# Altium PCB Pannel3.5x3.PcbDoc (part 1 of 4)
Units mil, origin at the board's own origin, x right, y up, seen from the top; angles counter-clockwise.
Board outline 3543.31 x 2771.65 mil, 4 copper layers (SIGNAL, GROUND, PWR, SIGNAL (Bottom)), stack 61.627 mil thick; 248 components, 189 nets, 921 pads, 651 vias.
Unrouted connection lines stored in the file: 1.
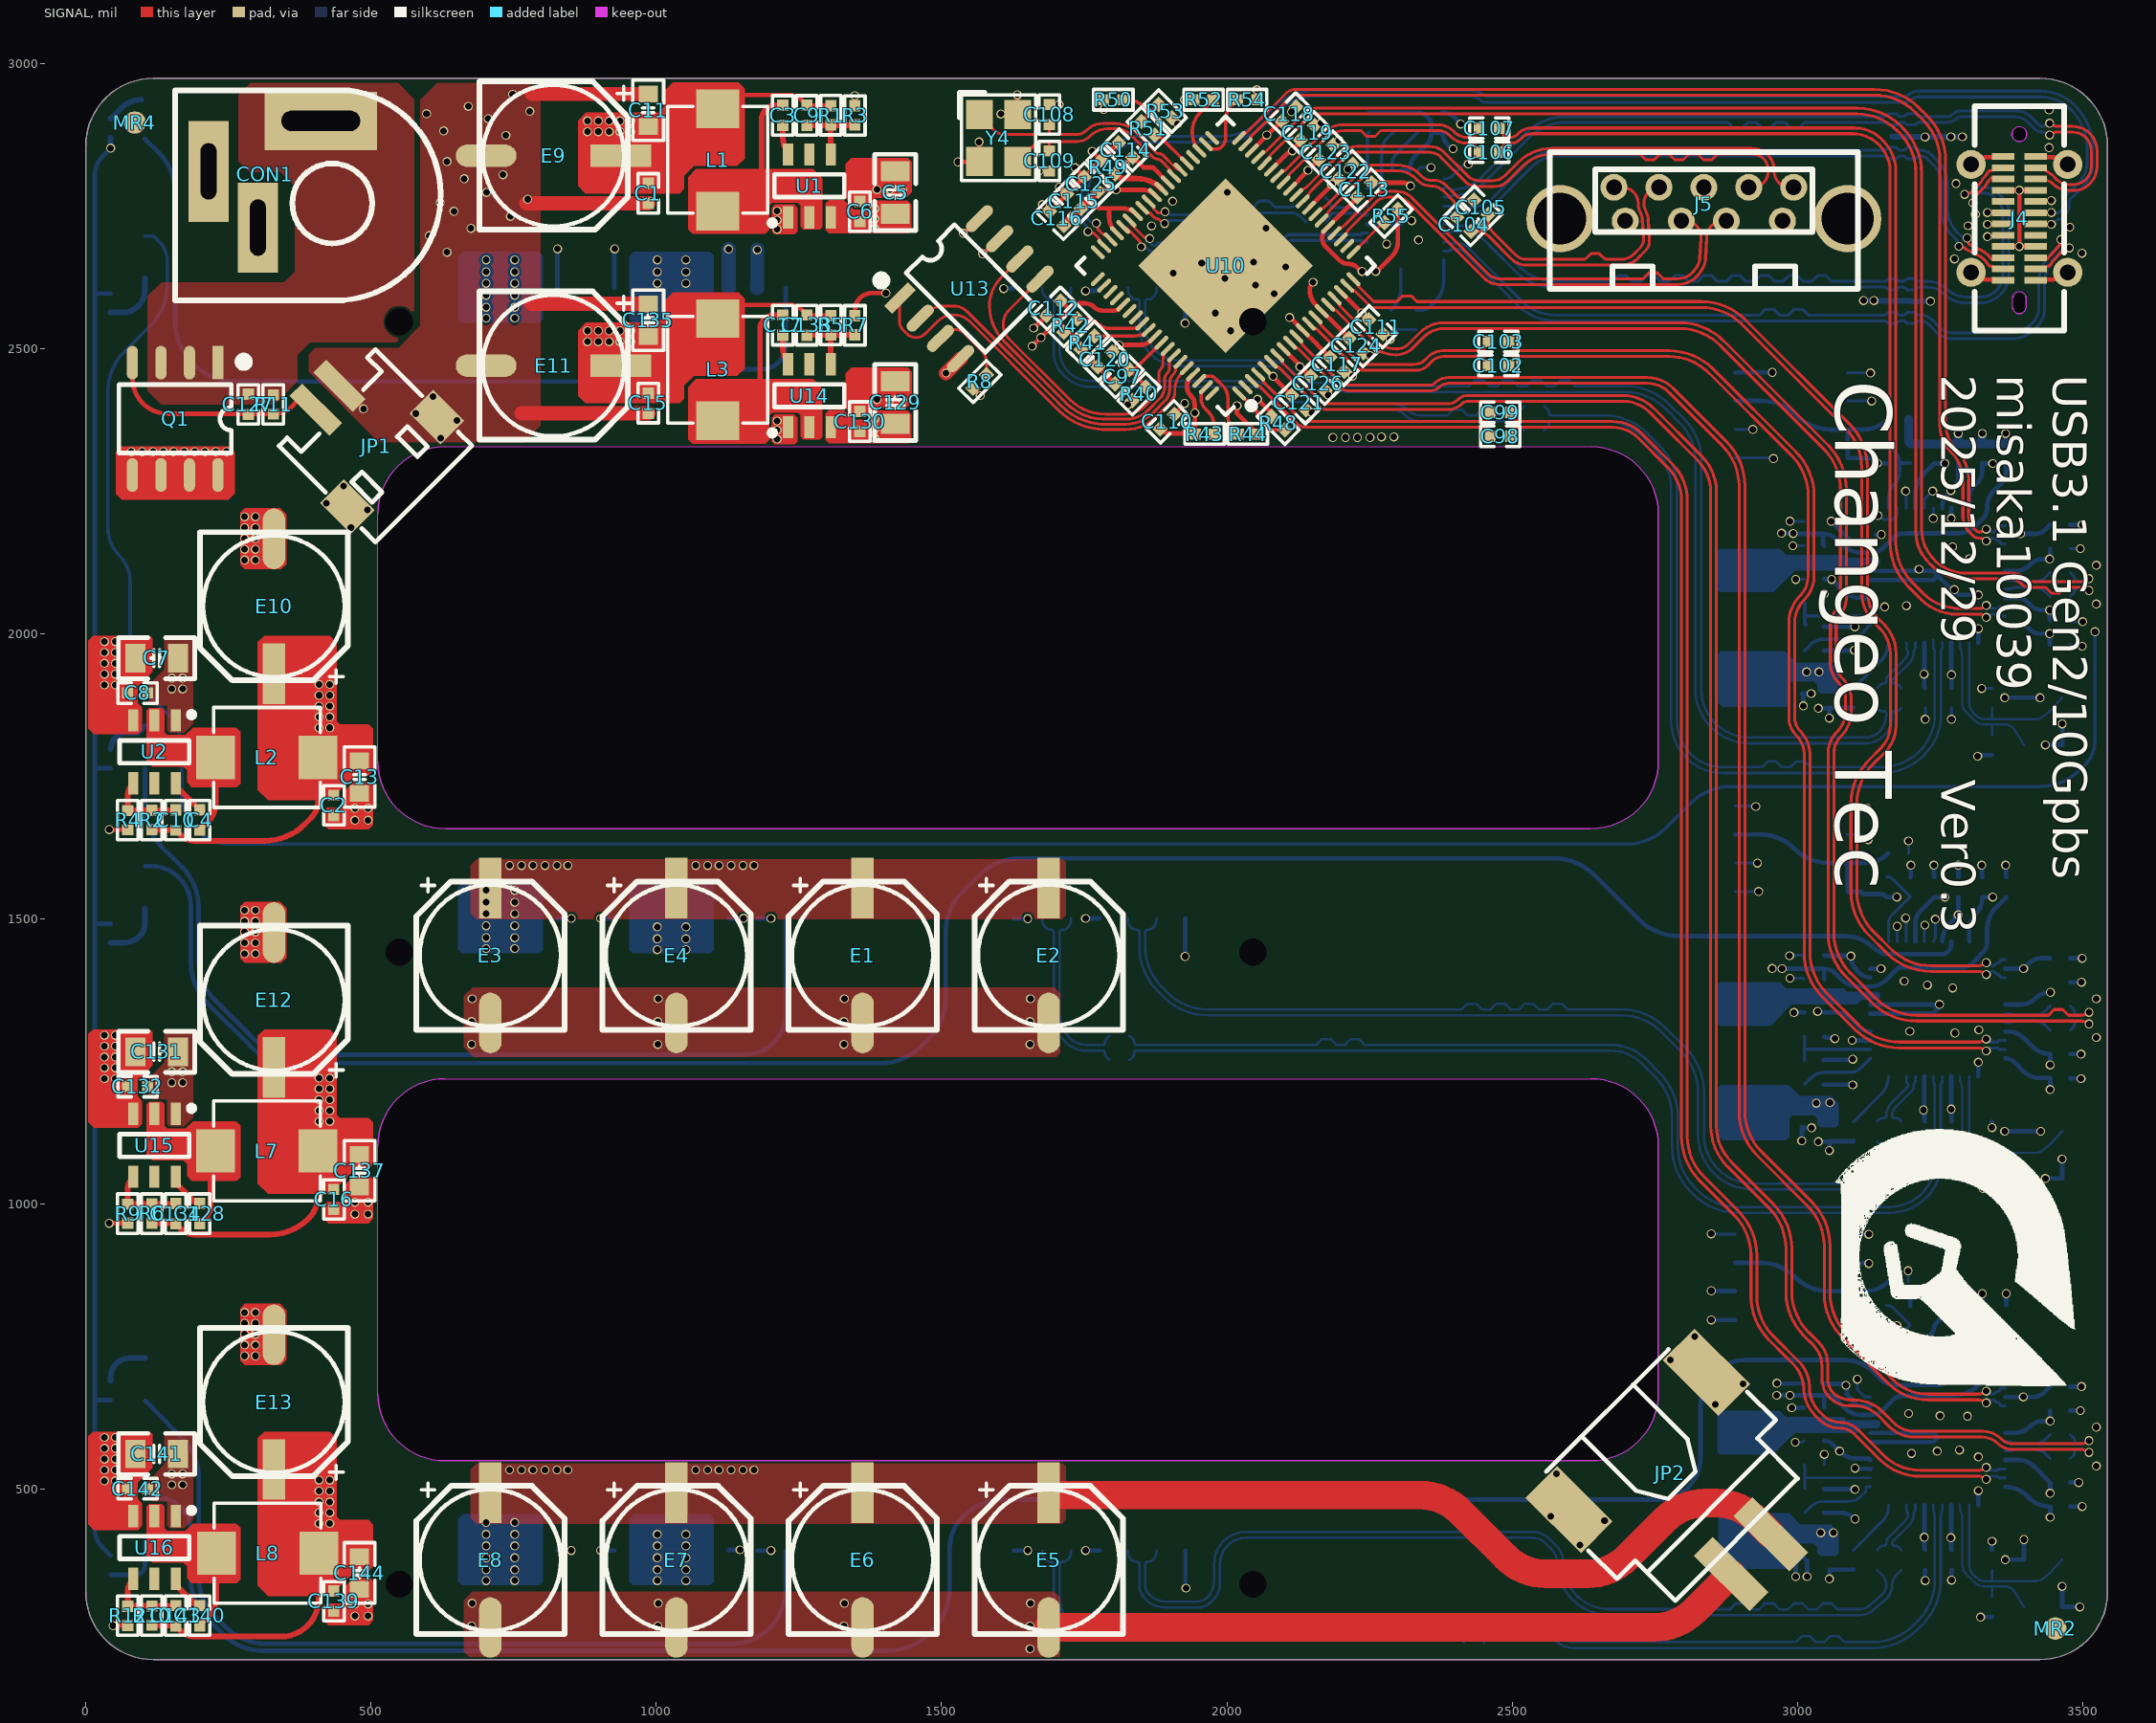
[diagram p0: SIGNAL view]
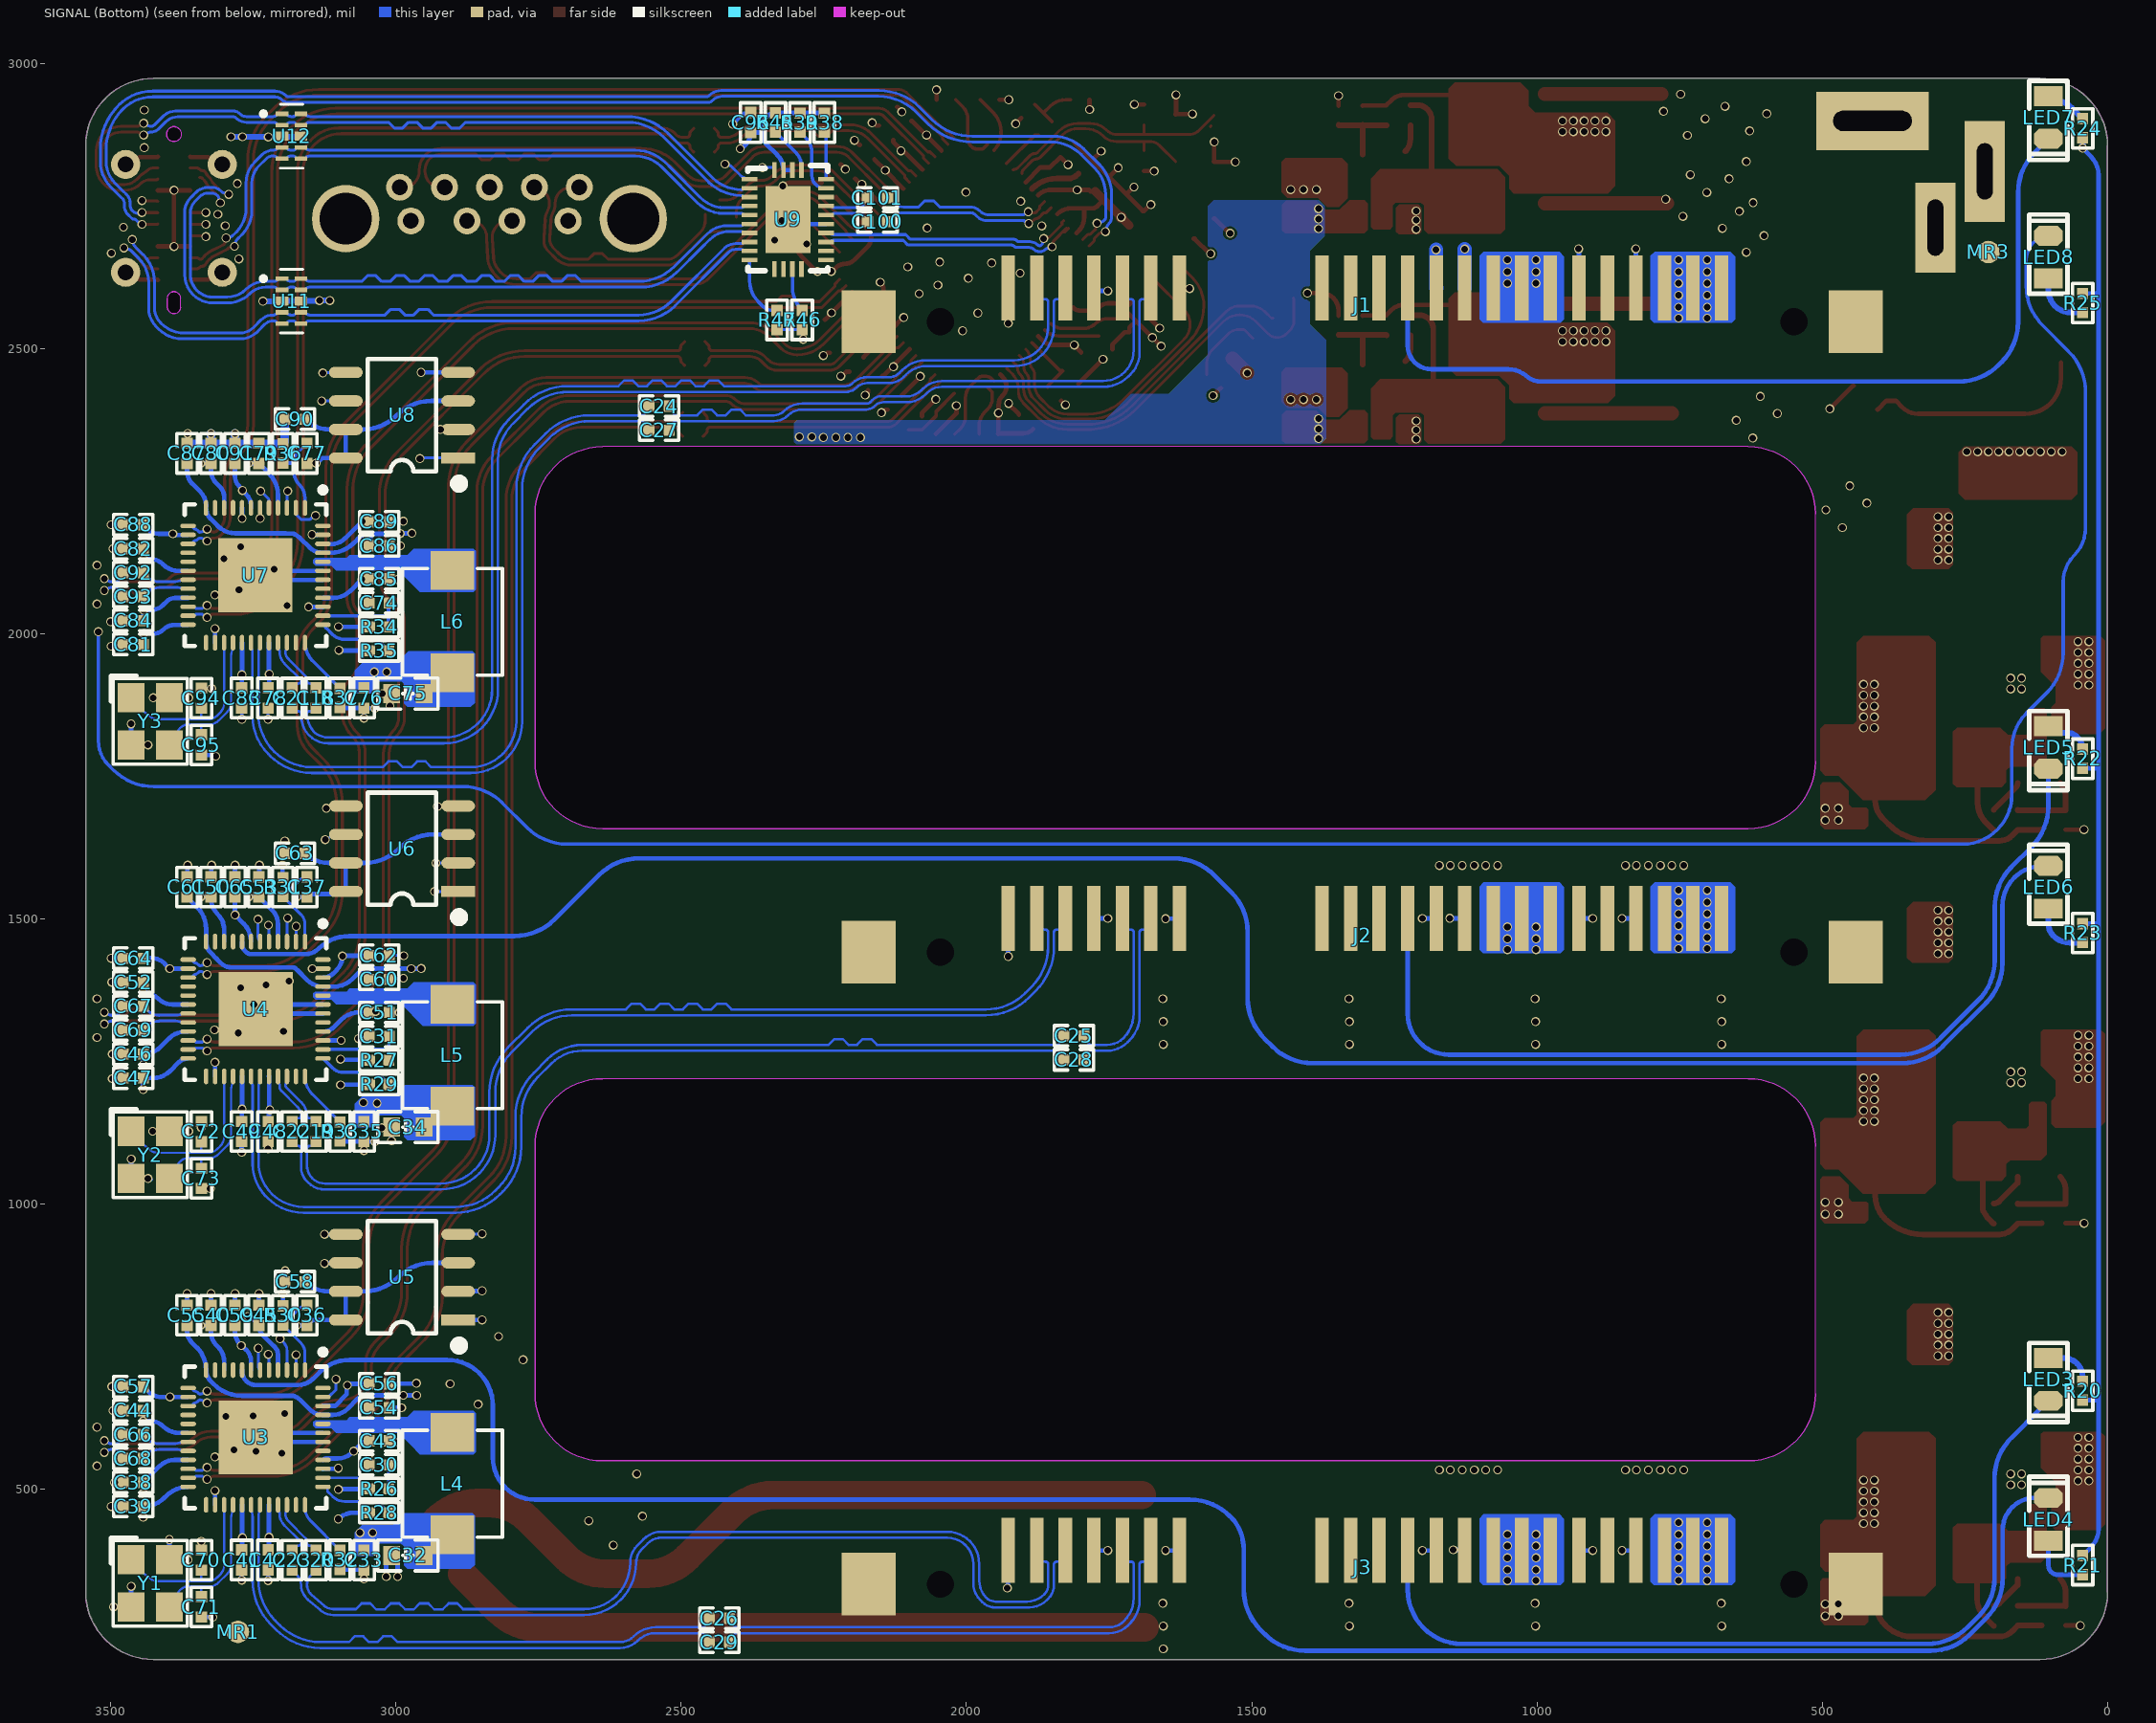
[diagram p1: SIGNAL (Bottom) view, seen from below]
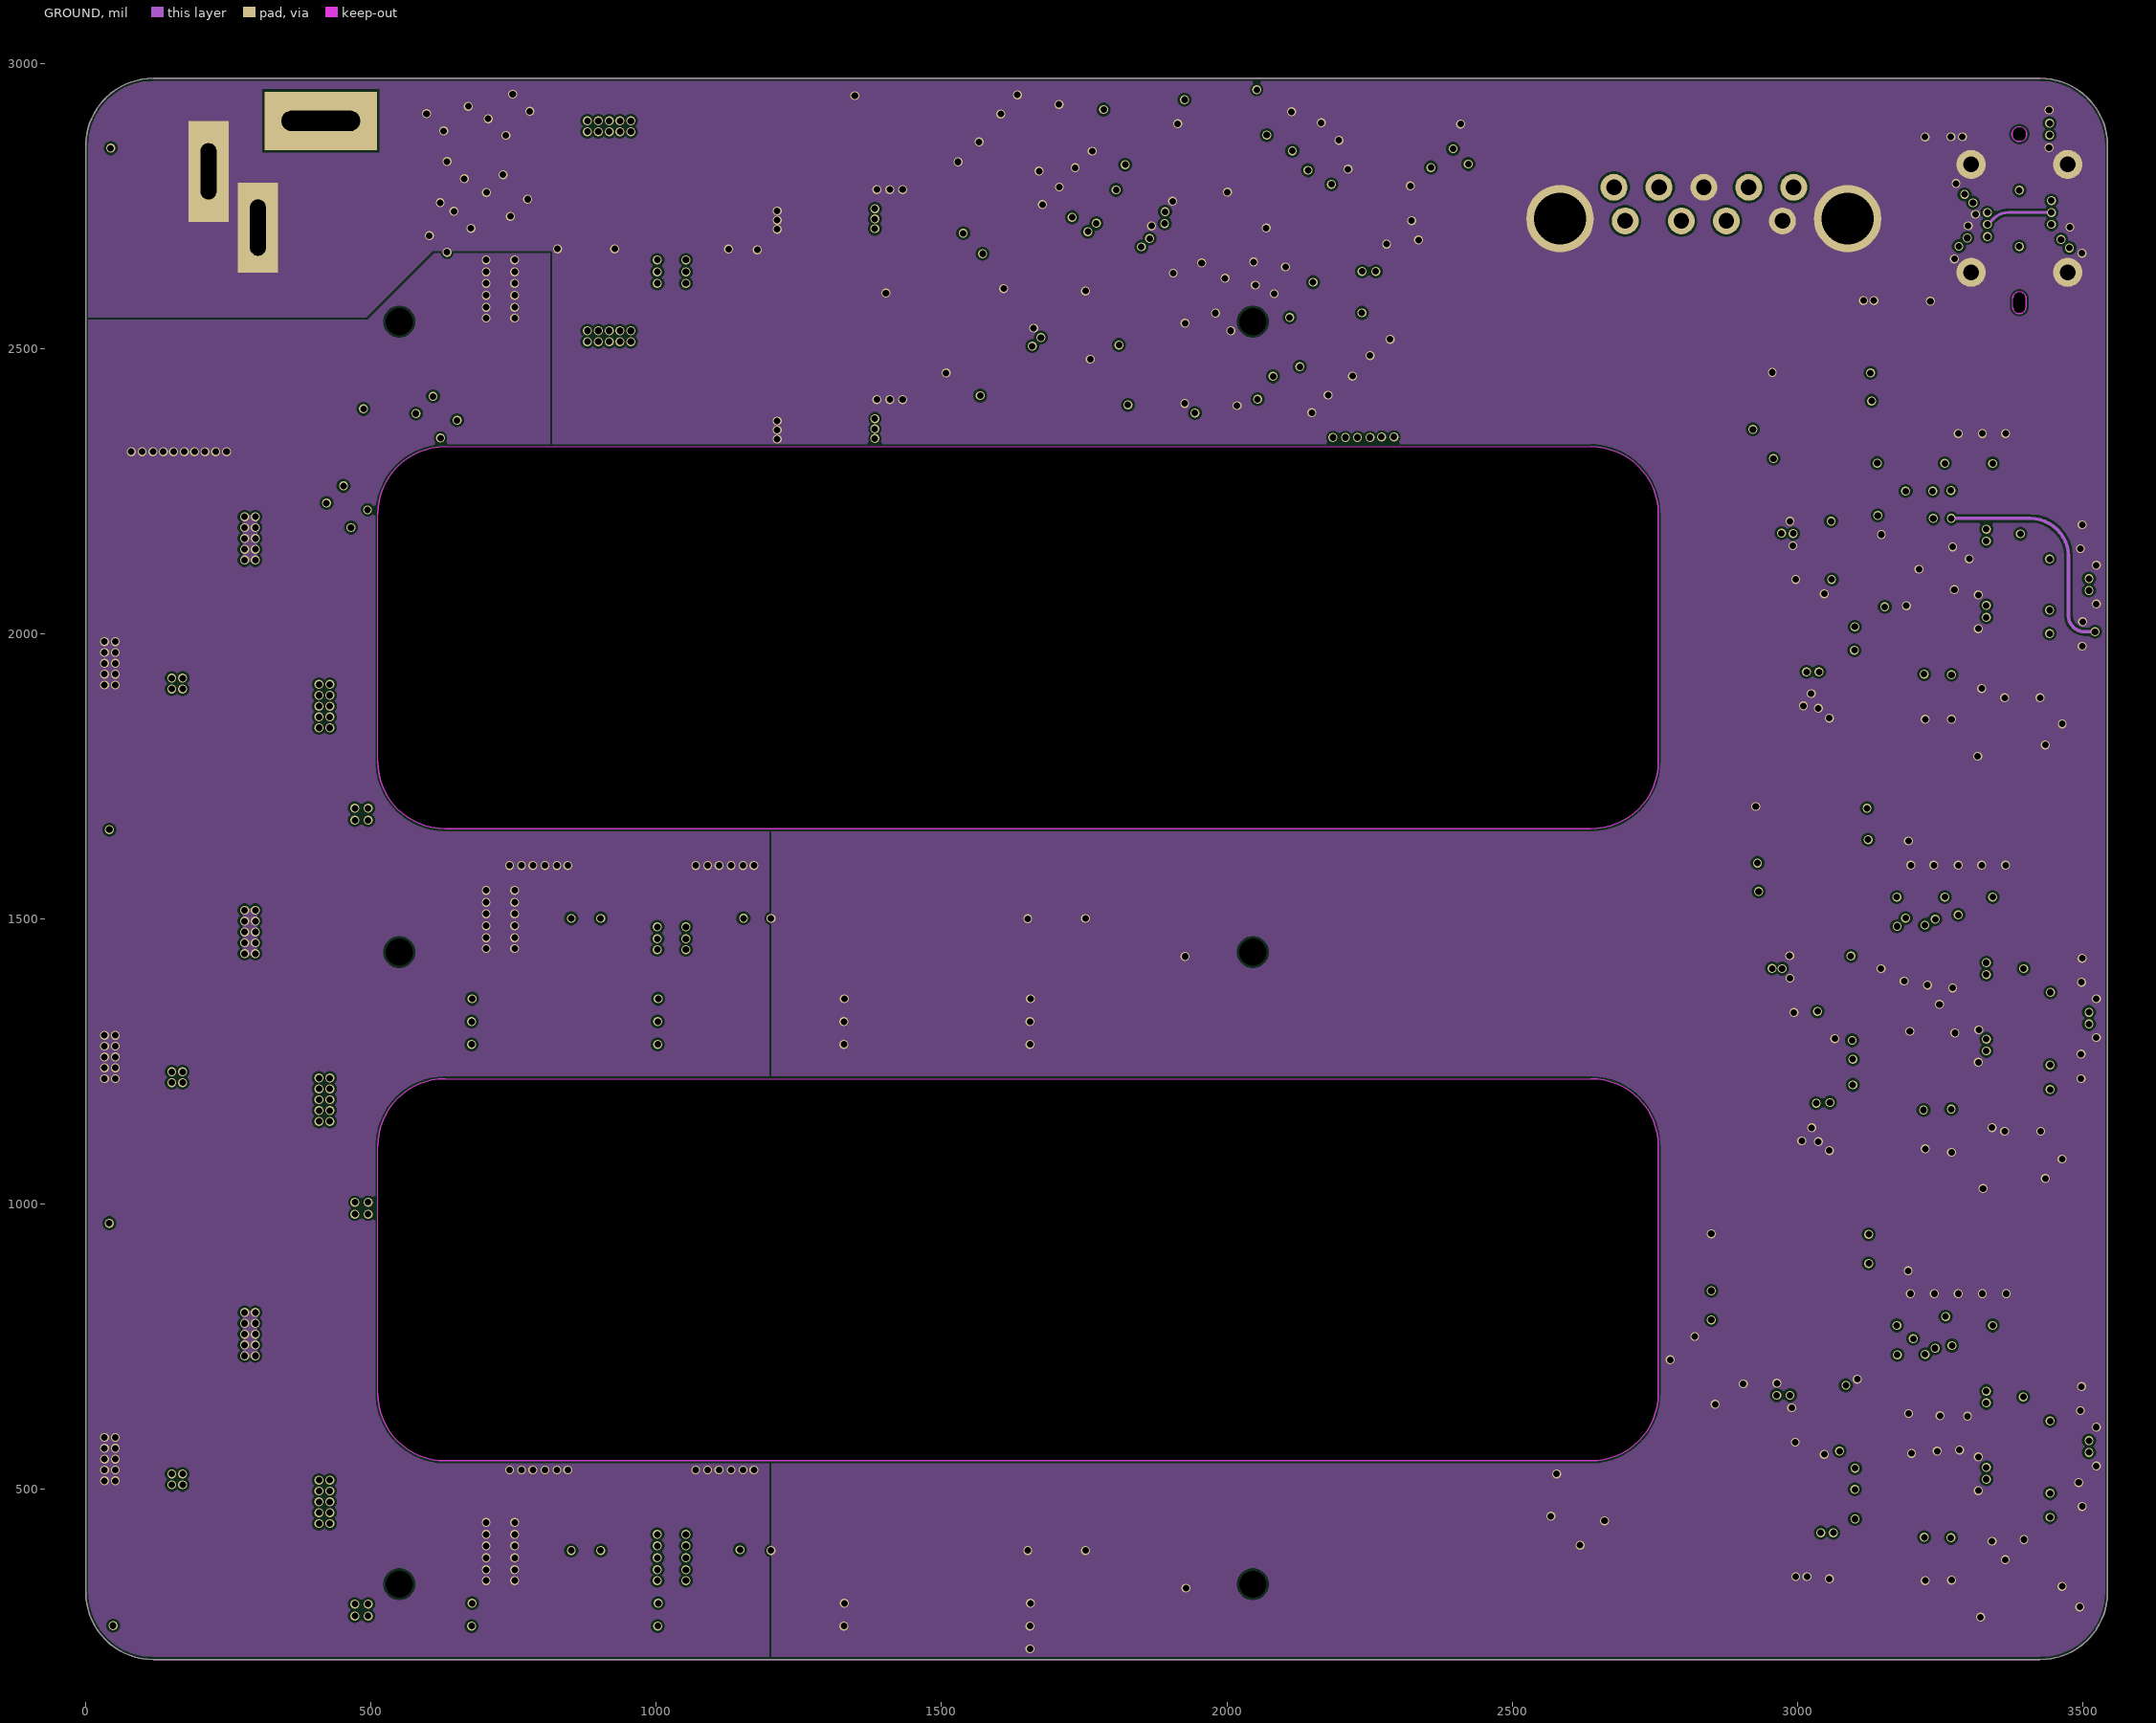
[diagram p2: GROUND]
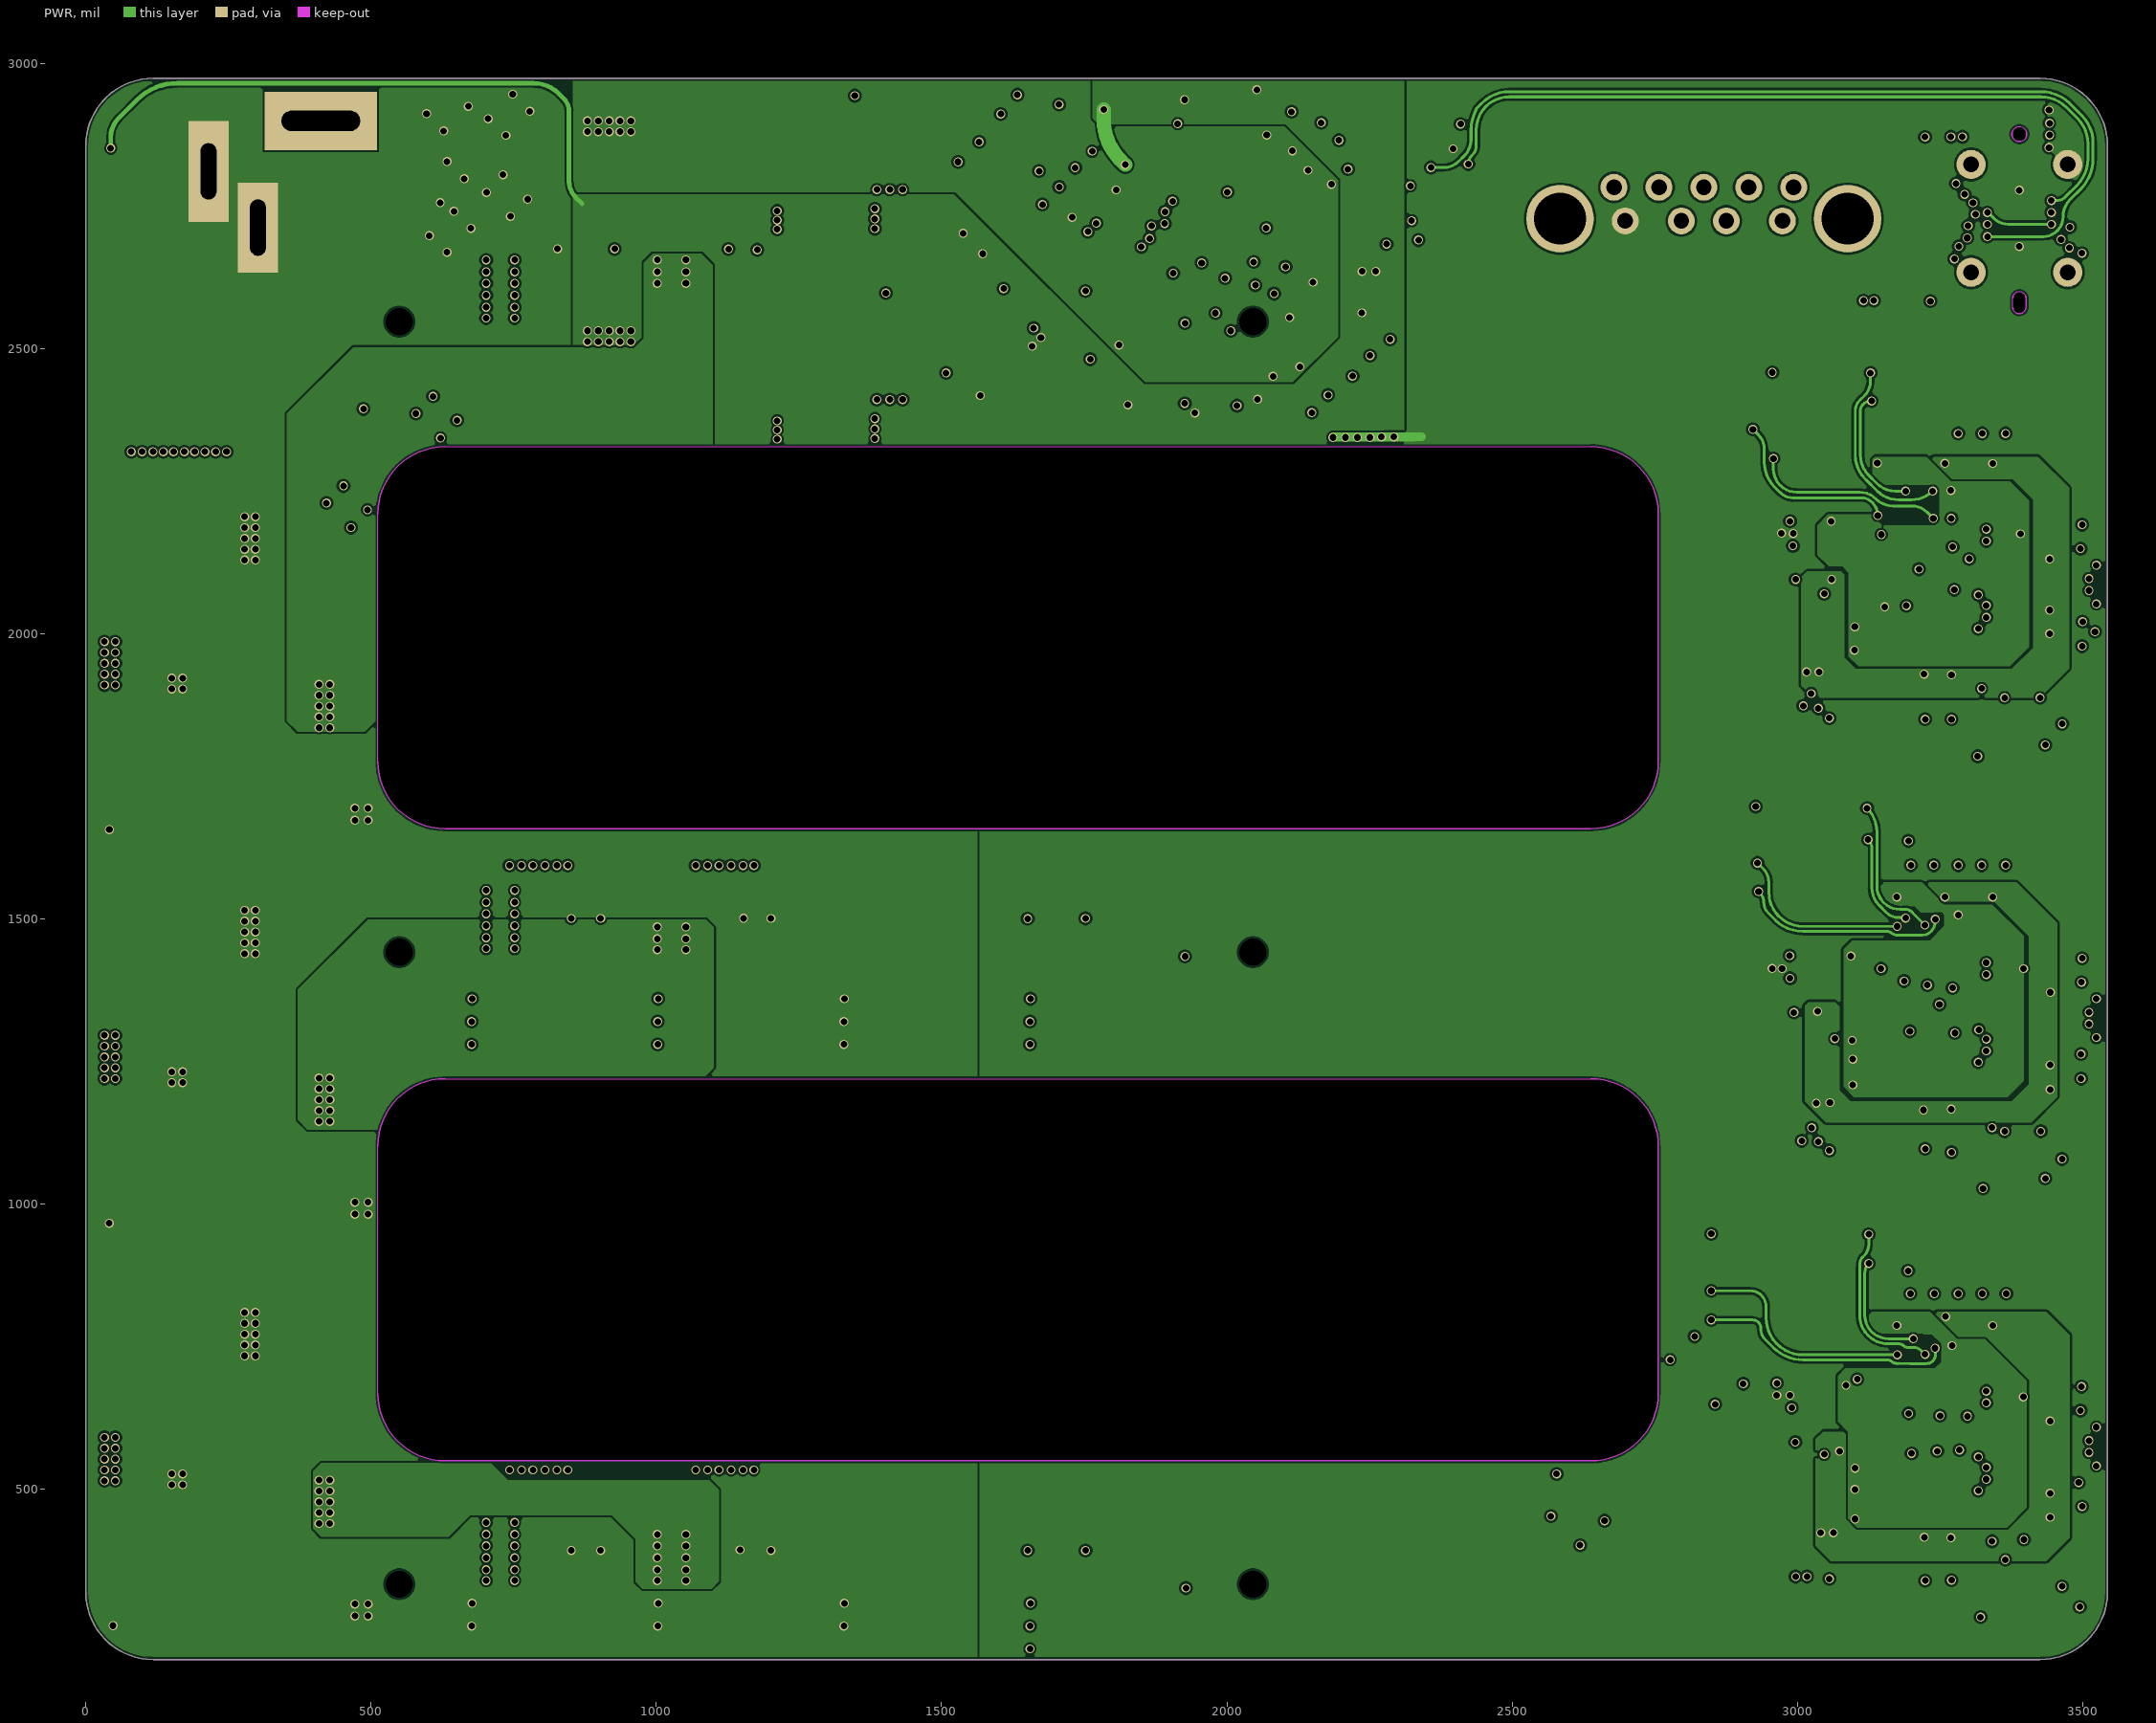
[diagram p3: PWR]
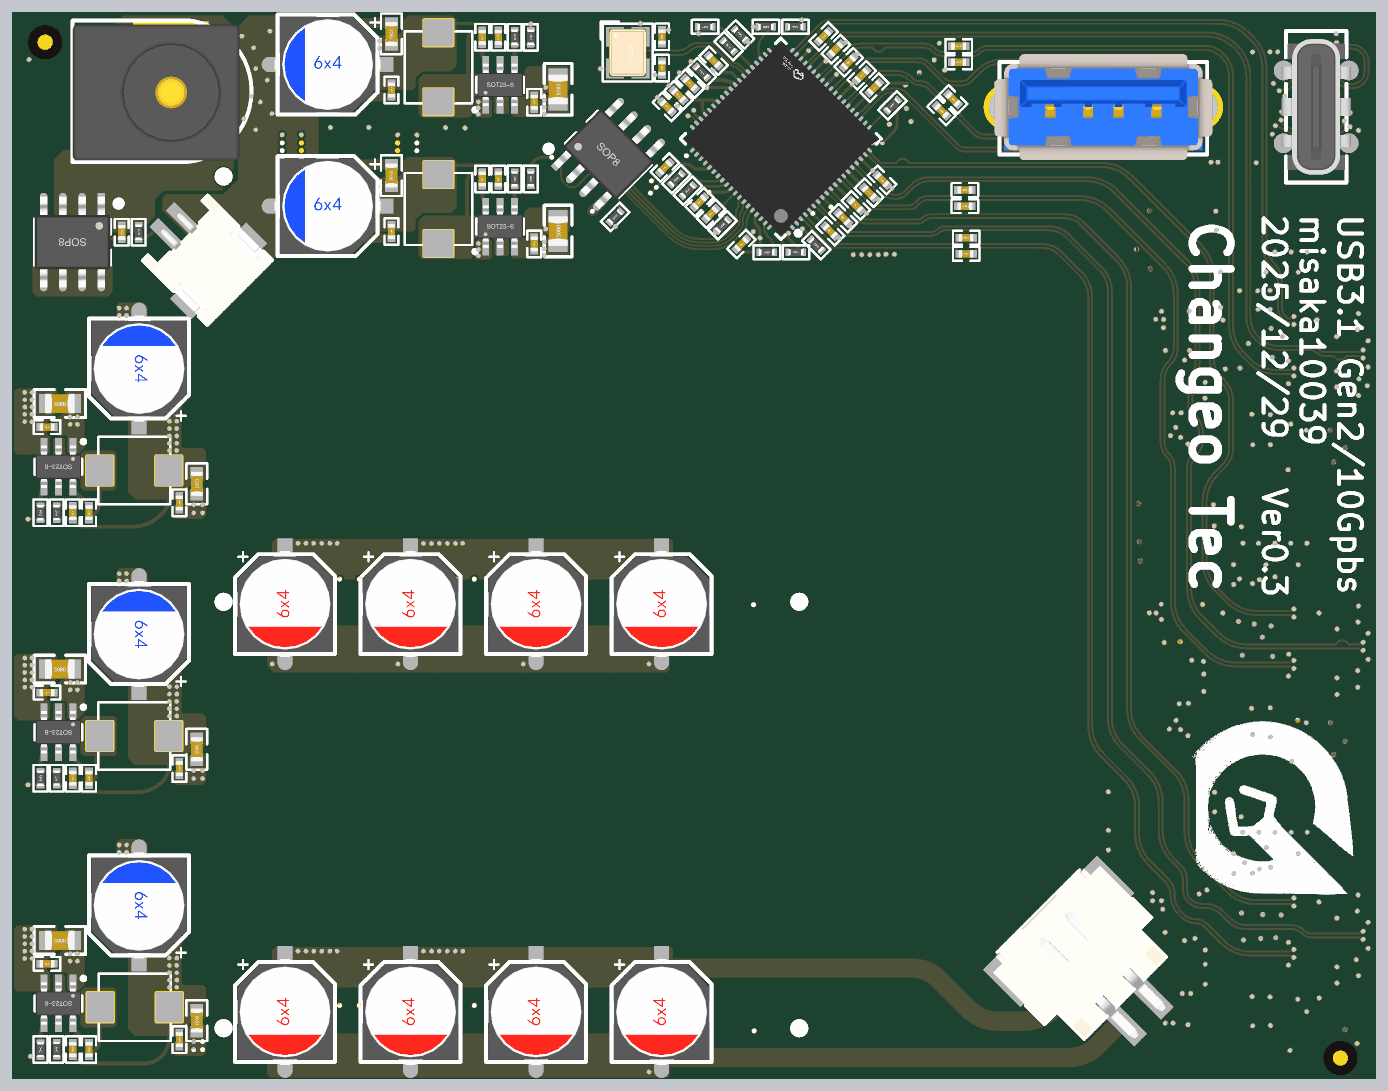
[diagram p7: 3D render of the assembled board from above, using the file's embedded part models]
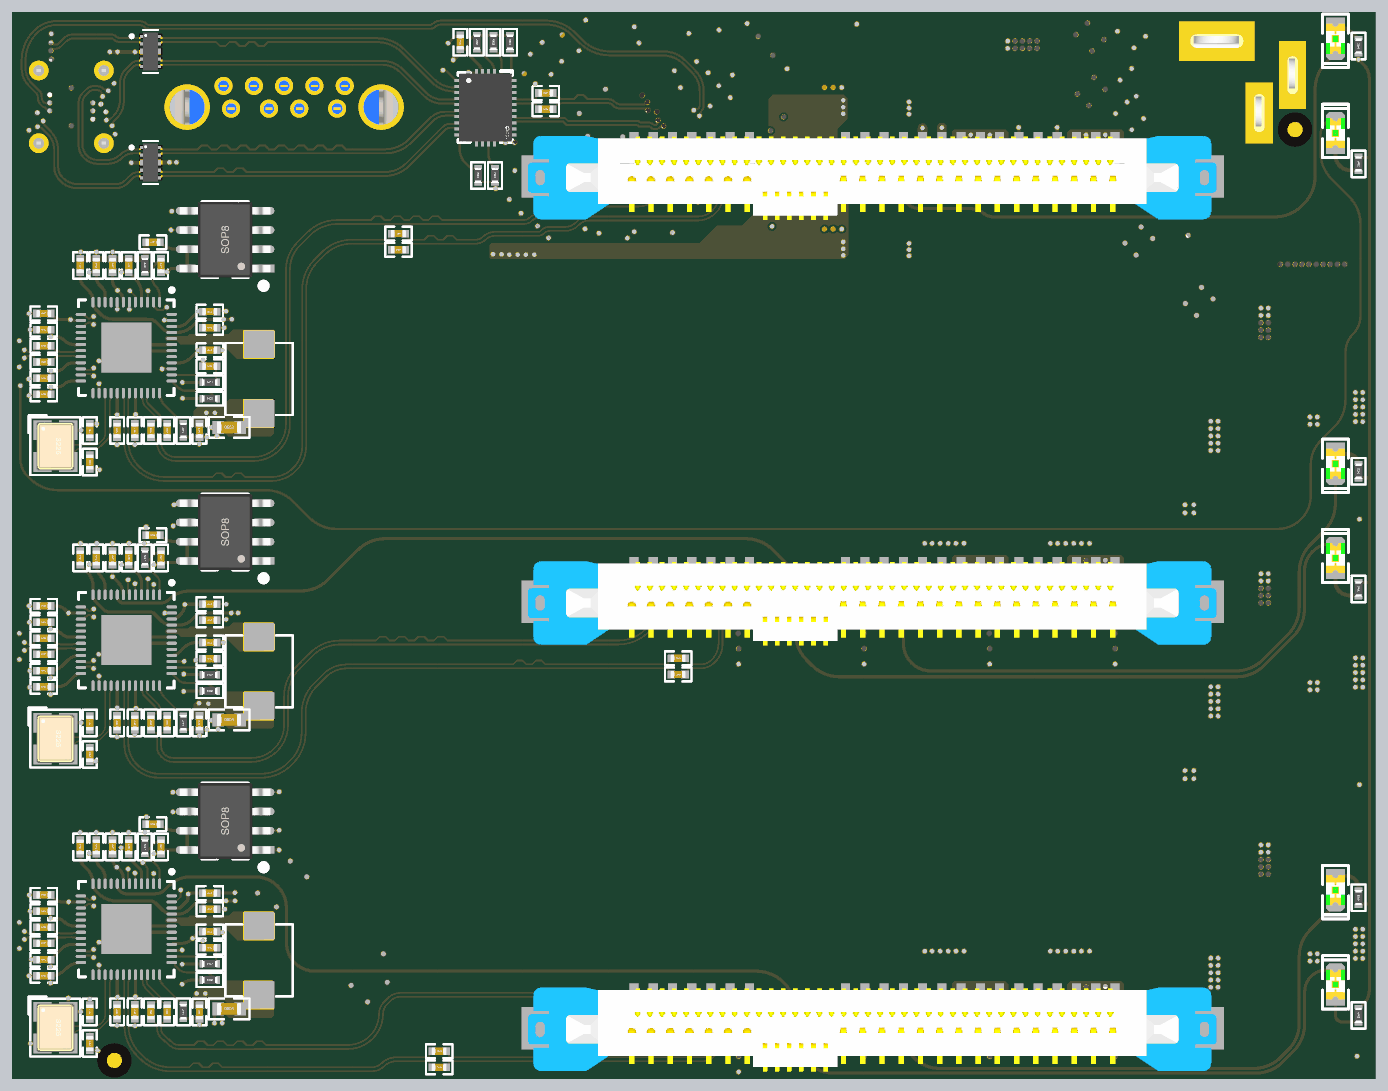
[diagram p8: 3D render of the assembled board from below, using the file's embedded part models]

## Layer stack, top to bottom
Top Solder: solder mask 0.3937, Solder Resist, Dk 3.5
SIGNAL: signal copper 1.4
Dielectric 2: prepreg 3.9134, PP-006, Dk 4.1
GROUND: signal copper 0.5984
Dielectric 1: dielectric 49.8031, FR-4, Dk 4.8
PWR: signal copper 0.5984
Dielectric 3: prepreg 3.9134, PP-006, Dk 4.1
SIGNAL (Bottom): signal copper 1.4
Bottom Solder: solder mask 0.3937, Solder Resist, Dk 3.5

## Board outline
118.36,201.69 cw(c118.4,319.85) 0.25,319.8 0.25,2855.24 cw(c118.34,2855.26) 118.36,2973.35 3425.45,2973.35 cw(c3425.54,2855.33) 3543.56,2855.24 3543.56,319.8 cw(c3425.47,319.78) 3425.45,201.69
cut-out: 630.17,1657.96 cw(c630.17,1776.07) 512.06,1776.07 512.06,2209.57 cw(c630.17,2209.57) 630.17,2327.68 2638.05,2327.68 cw(c2638.05,2209.57) 2756.16,2209.57 2756.16,1776.07 cw(c2638.05,1776.07) 2638.05,1657.96
cut-out: 512.06,668.09 512.06,1101.59 cw(c630.17,1101.59) 630.17,1219.7 2638.05,1219.7 cw(c2638.05,1101.59) 2756.16,1101.59 2756.16,668.09 cw(c2638.05,668.09) 2638.05,549.98 630.17,549.98 cw(c630.17,668.09)

## Design rules (kind name [scope] priority, off if disabled: settings)
Clearance [All] p1: gap=4 ignorepadtopadclearanceinfootprint=FALSE except(0: Arc-Text Arc-Hole Track-Text Track-Hole SMDPad-Text SMDPad-Hole THPad-Text THPad-Hole Via-Text Via-Hole Fill-Text Fill-Hole Poly-Text Poly-Hole Region-Text Region-Hole Text-Text Text-Hole; 5: Arc-Via Track-Via Via-Via; 6: SMDPad-Via THPad-Via; 10: THPad-THPad)
ComponentClearance [All] p1: gap=0 collisioncheckmode=3 verticalgap=0 showdistances=FALSE
DiffPairsRouting "Schematic Differential Pairs Routing_1" [InNetClass('SATA')] p1: maxlimit=6 minlimit=6 mostfreqgap=6 toplayer_minwidth=4.29 toplayer_maxwidth=4.29 toplayer_prefwidth=4.29 midlayer1_minwidth=4.29 midlayer1_maxwidth=4.29 midlayer1_prefwidth=4.29 midlayer2_minwidth=4.29 midlayer2_maxwidth=4.29 midlayer2_prefwidth=4.29 bottomlayer_minwidth=4.29 bottomlayer_maxwidth=4.29 bottomlayer_prefwidth=4.29 maxuncoupledlength=500
DiffPairsRouting "Schematic Differential Pairs Routing" [InNetClass('USB')] p2: maxlimit=5 minlimit=5 mostfreqgap=5 toplayer_minwidth=5.1 toplayer_maxwidth=5.1 toplayer_prefwidth=5.1 midlayer1_minwidth=5.1 midlayer1_maxwidth=5.1 midlayer1_prefwidth=5.1 midlayer2_minwidth=5.1 midlayer2_maxwidth=5.1 midlayer2_prefwidth=5.1 bottomlayer_minwidth=5.1 bottomlayer_maxwidth=5.1 bottomlayer_prefwidth=5.1 maxuncoupledlength=500
DiffPairsRouting [All] p3: maxlimit=10 minlimit=10 mostfreqgap=10 toplayer_minwidth=15 toplayer_maxwidth=15 toplayer_prefwidth=15 midlayer1_minwidth=15 midlayer1_maxwidth=15 midlayer1_prefwidth=15 midlayer2_minwidth=15 midlayer2_maxwidth=15 midlayer2_prefwidth=15 bottomlayer_minwidth=15 bottomlayer_maxwidth=15 bottomlayer_prefwidth=15 maxuncoupledlength=500
MinimumSolderMaskSliver [All] p1: minsoldermaskwidth=0
NetAntennae [All] p1 off: netantennaetolerance=3.94
PlaneClearance [All] p1: clearance=8
PlaneConnect [All] p1: planeconnectstyle=Direct reliefexpansion=20 reliefentries=4 reliefconductorwidth=10 reliefairgap=10
PolygonConnect [All] p1: connectstyle=Direct reliefconductorwidth=10 reliefentries=4 polygonreliefangle="90 Angle" airgapwidth=10
RoutingVias "Schematic Routing Via Style_1" [InNetClass('SATA')] p1: holewidth=11.81 width=15.75 viastyle="Through Hole" minholewidth=7.87 minwidth=11.81 maxholewidth=28 maxwidth=50
RoutingVias "Schematic Routing Via Style" [InNetClass('USB')] p2: holewidth=11.81 width=15.75 viastyle="Through Hole" minholewidth=7.87 minwidth=11.81 maxholewidth=28 maxwidth=39.37
RoutingVias [All] p3: holewidth=11.81 width=15.75 viastyle="Through Hole" minholewidth=11.81 minwidth=15.75 maxholewidth=19.68 maxwidth=23.62
SilkToSolderMaskClearance [IsPad] p1: minsilkscreentomaskgap=0 clearancetoexposedcopper=TRUE
SolderMaskExpansion 过孔盖油 [isvia] p1: expansion=4 istentingtop=TRUE
Width [All] p1: maxlimit=100 minlimit=2 preferedwidth=4
23 further rules are at their usual default settings.

## Classes and differential pairs
net class USB: cap_SSRX1_N cap_SSRX1_P cap_SSRX2_N cap_SSRX2_P cap_SSTX1_N cap_SSTX1_P cap_SSTX2_N cap_SSTX2_P cap_SSTX3_N cap_SSTX3_P cap_SSTX4_N cap_SSTX4_P cap_SSTX_N cap_SSTX_P HSD1_N HSD1_P HSD2_N HSD2_P HSD3_N HSD3_P HSD4_N HSD4_P IN_CC1 IN_CC2 IN_SSRX1_N IN_SSRX1_P IN_SSRX2_N IN_SSRX2_P IN_SSTX1_N IN_SSTX1_P IN_SSTX2_N IN_SSTX2_P SSRX1_N SSRX1_P SSRX2_N SSRX2_P SSRX3_N SSRX3_P SSRX4_N SSRX4_P SSRX_N SSRX_P SSTX1_N SSTX1_P SSTX2_N SSTX2_P SSTX3_N SSTX3_P SSTX4_N SSTX4_P SSTX_N SSTX_P USBD_N USBD_P
net class SATA: cap_RX1_N cap_RX1_P cap_RX2_N cap_RX2_P cap_RX3_N cap_RX3_P cap_TX1_N cap_TX1_P cap_TX2_N cap_TX2_P cap_TX3_N cap_TX3_P RX1_N RX1_P RX2_N RX2_P RX3_N RX3_P TX1_N TX1_P TX2_N TX2_P TX3_N TX3_P
net class PWR: GND VBUS VCC1.05V-VL822 VCC1V2-A VCC1V2-B VCC1V2-C VCC3.3V-VL822 VCC5V-A VCC5V-B VCC5V-C VCC12V VIN
component class vl822: C96 C97 C98 C99 C100 C101 C102 C103 C104 C105 C106 C107 C108 C109 C110 C111 C112 C113 C114 C115 C116 C117 C118 C119 C120 C121 C122 C123 C124 C125 C126 R8 R38 R39 R40 R41 R42 R43 R44 R45 R46 R47 R48 R49 R50 R51 R52 R53 R54 R55 U9 U10 U11 U12 U13 Y4
component class pwr: C1 C2 C3 C4 C5 C6 C7 C8 C9 C10 C11 C13 C15 C16 C17 C127 C128 C129 C130 C131 C132 C133 C134 C135 C137 C139 C140 C141 C142 C143 C144 E1 E2 E3 E4 E5 E6 E7 E8 E9 E10 E11 E12 E13 JP1 JP2 L1 L2 L3 L7 L8 MR1 MR2 MR3 MR4 Q1 R1 R2 R3 R4 R5 R6 R7 R9 R10 R11 R12 U1 U2 U14 U15 U16
component class jmb575: C30 C31 C32 C33 C34 C35 C36 C37 C38 C39 C40 C41 C42 C43 C44 C45 C46 C47 C48 C49 C50 C51 C52 C53 C54 C55 C56 C57 C58 C59 C60 C61 C62 C63 C64 C65 C66 C67 C68 C69 C70 C71 C72 C73 C74 C75 C76 C77 C78 C79 C80 C81 C82 C83 C84 C85 C86 C87 C88 C89 C90 C91 C92 C93 C94 C95 L4 L5 L6 R26 R27 R28 R29 R30 R31 R32 R33 R34 R35 R36 R37 U3 U4 U5 U6 U7 U8 Y1 Y2 Y3
component class connector: C18 C19 C20 C21 C22 C23 C24 C25 C26 C27 C28 C29 CON1 J1 J2 J3 J4 J5 LED3 LED4 LED5 LED6 LED7 LED8 R20 R21 R22 R23 R24 R25
differential pair cap_SSRX4: +cap_SSRX4_P -cap_SSRX4_N
differential pair cap_SSRX1: +cap_SSRX1_P -cap_SSRX1_N
differential pair SSTX1: +SSTX1_P -SSTX1_N
differential pair cap_TX2: +cap_TX2_P -cap_TX2_N
differential pair cap_RX3: +cap_RX3_P -cap_RX3_N
differential pair TX1: +TX1_P -TX1_N
differential pair RX1: +RX1_P -RX1_N
differential pair cap_TX3: +cap_TX3_P -cap_TX3_N
differential pair cap_RX2: +cap_RX2_P -cap_RX2_N
differential pair USBD: +USBD_P -USBD_N
differential pair TX3: +TX3_P -TX3_N
differential pair TX2: +TX2_P -TX2_N
differential pair SSTX: +SSTX_P -SSTX_N
differential pair SSTX4: +SSTX4_P -SSTX4_N
differential pair SSTX3: +SSTX3_P -SSTX3_N
differential pair SSTX2: +SSTX2_P -SSTX2_N
differential pair SSRX: +SSRX_P -SSRX_N
differential pair SSRX4: +SSRX4_P -SSRX4_N
differential pair SSRX3: +SSRX3_P -SSRX3_N
differential pair SSRX2: +SSRX2_P -SSRX2_N
differential pair SSRX1: +SSRX1_P -SSRX1_N
differential pair RX3: +RX3_P -RX3_N
differential pair RX2: +RX2_P -RX2_N
differential pair IN_SSTX2: +IN_SSTX2_P -IN_SSTX2_N
differential pair IN_SSTX1: +IN_SSTX1_P -IN_SSTX1_N
differential pair IN_SSRX2: +IN_SSRX2_P -IN_SSRX2_N
differential pair IN_SSRX1: +IN_SSRX1_P -IN_SSRX1_N
differential pair HSD4: +HSD4_P -HSD4_N
differential pair HSD3: +HSD3_P -HSD3_N
differential pair HSD2: +HSD2_P -HSD2_N
differential pair HSD1: +HSD1_P -HSD1_N
differential pair cap_TX1: +cap_TX1_P -cap_TX1_N
differential pair cap_SSTX: +cap_SSTX_P -cap_SSTX_N
differential pair cap_SSTX4: +cap_SSTX4_P -cap_SSTX4_N
differential pair cap_SSTX3: +cap_SSTX3_P -cap_SSTX3_N
differential pair cap_SSTX2: +cap_SSTX2_P -cap_SSTX2_N
differential pair cap_SSTX1: +cap_SSTX1_P -cap_SSTX1_N
differential pair cap_SSRX3: +cap_SSRX2_P -cap_SSRX2_N
differential pair cap_RX1: +cap_RX1_P -cap_RX1_N

## Components (designator, comment, footprint, x,y, rotation, side; value= is the part's Value field where it differs from the comment)
C1 "100nF 50V" C0402_L 986,2772 r270 top locked
C2 "100nF 50V" C0402_L 435,1699 r270 top
C3 "100nF 50V" C0402_L 1222,2908.72 r90 top locked
C4 "100nF 50V" C0402_L 200,1673.39 r270 top locked
C5 "22uF 10V" C0805_L 1419,2773.4 r270 top locked
C6 "100nF 50V" C0402_L 1357,2740 r270 top locked
C7 "22uF 25V" C0805_L 124.48,1957 r180 top locked
C8 "100nF 50V" C0402_L 91,1896 r180 top locked
C9 "150PF 50V" C0402_L 1264,2908.72 r90 top locked
C10 "68PF 50V" C0402_L 158,1673.39 r270 top locked
C11 "22uF 10V" C0603_L 986,2917.54 r90 top locked
C13 "22uF 10V" C0603_L 480,1748.54 r270 top locked
C15 "100nF 50V" C0402_L 986,2404 r270 top
C16 "100nF 50V" C0402_L 435,1008.28 r270 top
C17 "100nF 50V" C0402_L 1222,2540.72 r90 top
C18 "10nF 6.3V" C0402_L 3140,1887.28 r90 bottom
C19 "10nF 6.3V" C0402_L 3140,1127.28 r90 bottom
C20 "10nF 6.3V" C0402_L 3140,376 r90 bottom
C21 "10nF 6.3V" C0402_L 3182,1887.28 r90 bottom
C22 "10nF 6.3V" C0402_L 3182,1127.28 r90 bottom
C23 "10nF 6.3V" C0402_L 3182,376 r90 bottom
C24 "10nF 6.3V" C0402_L 2538.87,2398.73 r0 bottom
C25 "10nF 6.3V" C0402_L 1812,1295 r0 bottom
C26 "10nF 6.3V" C0402_L 2433,274 r0 bottom
C27 "10nF 6.3V" C0402_L 2538.87,2356.73 r0 bottom
C28 "10nF 6.3V" C0402_L 1812,1253 r0 bottom
C29 "10nF 6.3V" C0402_L 2433,232 r0 bottom
C30 "1uF 10V" C0402_L 3029.28,543 r180 bottom
C31 "1uF 10V" C0402_L 3029.28,1294 r180 bottom
C32 "10uF 6.3V" C0603_L 2979,384 r180 bottom
C33 "100nF 6.3V" C0402_L 3056,376 r90 bottom
C34 "10uF 6.3V" C0603_L 2979,1135 r180 bottom
C35 "100nF 6.3V" C0402_L 3056,1127.28 r90 bottom
C36 "1uF 10V" C0402_L 3156,805 r270 bottom
C37 "1uF 10V" C0402_L 3156,1556 r270 bottom
C38 "100nF 6.3V" C0402_L 3460.55,512 r180 bottom
C39 "100nF 6.3V" C0402_L 3460.55,470 r180 bottom
C40 "100nF 6.3V" C0402_L 3324,805 r270 bottom
C41 "100nF 6.3V" C0402_L 3270.22,376.28 r90 bottom
C42 "100nF 6.3V" C0402_L 3224,376.28 r90 bottom
C43 "100nF 6.3V" C0402_L 3029.28,585 r0 bottom
C44 "100nF 6.3V" C0402_L 3460.55,638 r180 bottom
C45 "100nF 6.3V" C0402_L 3240,805 r270 bottom
C46 "100nF 6.3V" C0402_L 3460.55,1263 r180 bottom
C47 "100nF 6.3V" C0402_L 3460.55,1221 r180 bottom
C48 "100nF 6.3V" C0402_L 3224,1127.28 r90 bottom
C49 "100nF 6.3V" C0402_L 3270.22,1127.28 r90 bottom
C50 "100nF 6.3V" C0402_L 3324,1556 r270 bottom
C51 "100nF 6.3V" C0402_L 3029.28,1336 r0 bottom
C52 "100nF 6.3V" C0402_L 3460.55,1389 r180 bottom
C53 "100nF 6.3V" C0402_L 3240,1556 r270 bottom
C54 "100nF 6.3V" C0402_L 3029.28,643 r0 bottom
C55 "100nF 6.3V" C0402_L 3366,805 r270 bottom
C56 "100nF 6.3V" C0402_L 3029.28,685 r0 bottom
C57 "100nF 6.3V" C0402_L 3460.55,680 r180 bottom
C58 "100nF 6.3V" C0402_L 3177,864 r180 bottom
C59 "100nF 6.3V" C0402_L 3282,805 r270 bottom
C60 "100nF 6.3V" C0402_L 3029.28,1394 r0 bottom
C61 "100nF 6.3V" C0402_L 3366,1556 r270 bottom
C62 "100nF 6.3V" C0402_L 3029.28,1436 r0 bottom
C63 "100nF 6.3V" C0402_L 3177,1615 r180 bottom
C64 "100nF 6.3V" C0402_L 3460.55,1431 r180 bottom
C65 "100nF 6.3V" C0402_L 3282,1556 r270 bottom
C66 "100nF 6.3V" C0402_L 3460.55,596 r180 bottom
C67 "100nF 6.3V" C0402_L 3460.55,1347 r180 bottom
C68 "100nF 6.3V" C0402_L 3460.55,554 r180 bottom
C69 "100nF 6.3V" C0402_L 3460.55,1305 r180 bottom
C70 "33pF/16V" C0402_L 3341,376 r90 bottom
C71 "33pF/16V" C0402_L 3341,294 r270 bottom
C72 "33pF/16V" C0402_L 3341,1127 r90 bottom
C73 "33pF/16V" C0402_L 3341,1045 r270 bottom
C74 "1uF 10V" C0402_L 3029.28,2054 r180 bottom
C75 "10uF 6.3V" C0603_L 2979,1895 r180 bottom
C76 "100nF 6.3V" C0402_L 3056,1887.28 r90 bottom
C77 "1uF 10V" C0402_L 3156,2316 r270 bottom
C78 "100nF 6.3V" C0402_L 3224,1887.28 r90 bottom
C79 "100nF 6.3V" C0402_L 3240,2316 r270 bottom
C80 "100nF 6.3V" C0402_L 3324,2316 r270 bottom
C81 "100nF 6.3V" C0402_L 3460.55,1981 r180 bottom
C82 "100nF 6.3V" C0402_L 3460.55,2149 r180 bottom
C83 "100nF 6.3V" C0402_L 3270.22,1887.28 r90 bottom
C84 "100nF 6.3V" C0402_L 3460.55,2023 r180 bottom
C85 "100nF 6.3V" C0402_L 3029.28,2096 r0 bottom
C86 "100nF 6.3V" C0402_L 3029.28,2154 r0 bottom
C87 "100nF 6.3V" C0402_L 3366,2316 r270 bottom
C88 "100nF 6.3V" C0402_L 3460.55,2191 r180 bottom
C89 "100nF 6.3V" C0402_L 3029.28,2196 r0 bottom
C90 "100nF 6.3V" C0402_L 3177,2376 r180 bottom
C91 "100nF 6.3V" C0402_L 3282,2316 r270 bottom
C92 "100nF 6.3V" C0402_L 3460.55,2107 r180 bottom
C93 "100nF 6.3V" C0402_L 3460.55,2065 r180 bottom
C94 "33pF/16V" C0402_L 3341,1887 r90 bottom
C95 "33pF/16V" C0402_L 3341,1805 r270 bottom
C96 "100nF 10V" C0402_L 2378,2896.13 r270 bottom
C97 "100nF 6.3V" C0402_L 1816.47,2450.47 r225 top
C98 "100nF 6.3V" C0402_L 2479.5,2345.9 r180 top
C99 "100nF 6.3V" C0402_L 2479.5,2387.9 r180 top
C100 "100nF 6.3V" C0402_L 2156,2722 r180 bottom
C101 "100nF 6.3V" C0402_L 2156,2764 r180 bottom
C102 "100nF 6.3V" C0402_L 2476,2470 r180 top
C103 "100nF 6.3V" C0402_L 2476,2512 r180 top
C104 "100nF 6.3V" C0402_L 2415.47,2717.53 r135 top
C105 "100nF 6.3V" C0402_L 2445.47,2747.53 r135 top
C106 "100nF 6.3V" C0402_L 2460,2844 r180 top
C107 "100nF 6.3V" C0402_L 2460,2886 r180 top
C108 "22pF/16V" C0402_L 1689,2910 r90 top
C109 "22pF/16V" C0402_L 1689,2828.72 r270 top
C110 "100nF 6.3V" C0402_L 1895.47,2371.47 r225 top
C111 "100nF 6.3V" C0402_L 2261,2538 r135 top
C112 "100nF 6.3V" C0402_L 1696.47,2570.47 r45 top
C113 "100nF 6.3V" C0402_L 2241,2778 r225 top
C114 "100nF 6.3V" C0402_L 1823,2848 r315 top
C115 "100nF 6.3V" C0402_L 1732,2758 r315 top
C116 "100nF 6.3V" C0402_L 1702,2728 r315 top
C117 "100nF 6.3V" C0402_L 2193,2472 r135 top
C118 "100nF 6.3V" C0402_L 2109,2911 r225 top
C119 "100nF 6.3V" C0402_L 2141,2878 r225 top
C120 "100nF 6.3V" C0402_L 1786.47,2480.47 r45 top
C121 "100nF 6.3V" C0402_L 2126,2405 r135 top
C122 "100nF 6.3V" C0402_L 2208,2810 r225 top
C123 "100nF 6.3V" C0402_L 2174,2844 r225 top
C124 "100nF 6.3V" C0402_L 2227,2505 r135 top
C125 "100nF 6.3V" C0402_L 1762,2788 r315 top
C126 "100nF 6.3V" C0402_L 2160,2439 r135 top
C127 "1nF 25V" C0402_L 285,2402 r270 top
C128 "100nF 50V" C0402_L 200,983.39 r270 top locked
C129 "22uF 25V" C0805_L 1419,2405.4 r270 top
C130 "100nF 50V" C0402_L 1357,2372 r270 top
C131 "22uF 25V" C0805_L 124.48,1267 r180 top locked
C132 "100nF 50V" C0402_L 91,1206 r180 top locked
C133 "56PF 50V" C0402_L 1264,2540.72 r90 top
C134 "68PF 50V" C0402_L 158,983.39 r270 top locked
C135 "22uF 10V" C0603_L 986,2549.54 r90 top
C137 "22uF 10V" C0603_L 480,1058.54 r270 top locked
C139 "100nF 50V" C0402_L 435,304 r270 top
C140 "100nF 50V" C0402_L 200,278.39 r270 top locked
C141 "22uF 25V" C0805_L 124.48,562 r180 top locked
C142 "100nF 50V" C0402_L 91,501 r180 top locked
C143 "68PF 50V" C0402_L 158,278.39 r270 top locked
C144 "22uF 10V" C0603_L 480,353.54 r270 top locked
CON1 "3.5*1.3" DC-012 412.24,2899.01 r270 top locked
E1 "47uF/16V" "CS 6*4 - R" 1361.8,1435.67 r90 top
E2 "47uF/16V" "CS 6*4 - R" 1688,1435.67 r90 top
E3 "47uF/16V" "CS 6*4 - R" 709.41,1435.67 r90 top
E4 "47uF/16V" "CS 6*4 - R" 1035.61,1435.67 r90 top
E5 "47uF/16V" "CS 6*4 - R" 1688,376 r90 top
E6 "47uF/16V" "CS 6*4 - R" 1361.8,376 r90 top
E7 "47uF/16V" "CS 6*4 - R" 1035.61,376 r90 top
E8 "47uF/16V" "CS 6*4 - R" 709.41,376 r90 top
E9 "220uF/10V" "CS 6*4 - B" 820,2837.98 r0 top locked
E10 "220uF/10V" "CS 6*4 - B" 330,2048 r270 top locked
E11 "220uF/10V" "CS 6*4 - B" 820,2469.98 r0 top
E12 "220uF/10V" "CS 6*4 - B" 330,1358 r270 top locked
E13 "220uF/10V" "CS 6*4 - B" 330,653 r270 top locked
J1 "SATA15P" "SATA 15P 贴片" 2045.71,2547.04 r180 bottom locked
J2 "SATA15P" "SATA 15P 贴片" 2045.71,1441.78 r180 bottom locked
J3 "SATA15P" "SATA 15P 贴片" 2045.71,333.8 r180 bottom locked
J4 "TYPEC-501S-ACP24H92" "TypeC 24p 直立" 3389,2728 r270 top locked
J5 "USB3.1_Type-A" "USB3.1_Type-A 立式直插" 2836,2753 r0 top locked
JP1 "HDR-1X2" ZH1.5-WS-2P 537,2301 r45 top
JP2 "HDR-1X2" XH2.54-WS-2P 2780,525 r225 top locked
L1 "1.5uH" SMMS0420 1108,2830.68 r270 top locked
L2 "10uH" SMMS0420 317.69,1783 r180 top locked
L3 "4.7uH" SMMS0420 1108,2462.68 r270 top
L4 "4.7uH" SMMS0420 2901,510 r90 bottom
L5 "4.7uH" SMMS0420 2901,1261 r90 bottom
L6 "4.7uH" SMMS0420 2901,2021 r90 bottom locked
L7 "10uH" SMMS0420 317.69,1093 r180 top locked
L8 "10uH" SMMS0420 318.79,388 r180 top locked
LED3 "blue" "LED 0805B" 104,692.55 r270 bottom
LED4 "green" "LED 0805G" 104,447.46 r90 bottom
LED5 "blue" "LED 0805B" 104,1800.53 r270 bottom
LED6 "green" "LED 0805G" 104,1555.44 r90 bottom
LED7 "blue" "LED 0805B" 104,2905 r270 bottom
LED8 "green" "LED 0805G" 104,2659.91 r90 bottom
MR1 "MARK1.6" "Mark 1" 3277,250 r180 bottom
MR2 "MARK1.6" "Mark 1" 3452,256 r0 top
MR3 "MARK1.6" "Mark 1" 209,2669 r180 bottom
MR4 "MARK1.6" "Mark 1" 86,2896 r0 top
Q1 "Pmos_SOP8" SOP8_L 157,2376.57 r270 top
R1 "100K 1%" R0402_L 1306,2908.73 r270 top locked
R2 "100K 1%" R0402_L 116,1673.52 r90 top locked
R3 "66.5K 1%" R0402_L 1348,2908.73 r90 top locked
R4 "13.7K 1%" R0402_L 74,1673.27 r270 top locked
R5 "100K 1%" R0402_L 1306,2540.73 r270 top
R6 "100K 1%" R0402_L 116,983.52 r90 top locked
R7 "22.1K 1%" R0402_L 1348,2540.73 r90 top
R8 "10K 1%" R0402_L 1567,2442 r225 top
R9 "13.7K 1%" R0402_L 74,983.27 r270 top locked
R10 "100K 1%" R0402_L 116,278.52 r90 top locked
R11 "10K 1%" R0402_L 329,2402 r270 top
R12 "13.7K 1%" R0402_L 74,278.27 r270 top locked
R20 "4.7K 1%" R0402_L 44,673 r90 bottom
R21 "4.7K 1%" R0402_L 44,367 r270 bottom
R22 "4.7K 1%" R0402_L 44,1781 r90 bottom
R23 "4.7K 1%" R0402_L 44,1475 r270 bottom
R24 "4.7K 1%" R0402_L 44,2886 r90 bottom
R25 "4.7K 1%" R0402_L 44,2579.73 r270 bottom
R26 "330K 1%" R0402_L 3029.28,501 r180 bottom
R27 "330K 1%" R0402_L 3029.28,1252 r180 bottom
R28 "4.7K 1%" R0402_L 3029.28,459 r180 bottom
R29 "4.7K 1%" R0402_L 3029.28,1210 r180 bottom
R30 "100K 1%" R0402_L 3198,804.87 r270 bottom
R31 "100K 1%" R0402_L 3198,1555.87 r270 bottom
R32 "12K 1%" R0402_L 3098,376.41 r90 bottom
R33 "12K 1%" R0402_L 3098,1127.41 r90 bottom
R34 "330K 1%" R0402_L 3029.28,2012 r180 bottom
R35 "4.7K 1%" R0402_L 3029.28,1970 r180 bottom
R36 "100K 1%" R0402_L 3198,2315.87 r270 bottom
R37 "12K 1%" R0402_L 3098,1887.41 r90 bottom
R38 "10K 1%" R0402_L 2249,2896 r270 bottom
R39 "10K 1%" R0402_L 2292,2896 r270 bottom
R40 "4.7K 1%" R0402_L 1846.17,2420.17 r225 top
R41 "4.7K 1%" R0402_L 1756.17,2510.17 r225 top
R42 "4.7K 1%" R0402_L 1726.17,2540.17 r225 top
R43 "4.7K 1%" R0402_L 1961.27,2350 r180 top
R44 "4.7K 1%" R0402_L 2037,2350 r0 top
R45 "10K 1%" R0402_L 2335,2896.25 r90 bottom
R46 "20K 1%" R0402_L 2288,2550 r90 bottom
R47 "20K 1%" R0402_L 2332,2550 r90 bottom
R48 "4.7K 1%" R0402_L 2090,2369 r135 top
R49 "12.4k 1%" R0402_L 1792,2818 r135 top
R50 "4.7K 1%" R0402_L 1801,2936 r180 top
R51 "1M 1%" R0402_L 1862,2886 r135 top
R52 "4.7K 1%" R0402_L 1959,2936 r180 top
R53 "10K 1%" R0402_L 1892,2916 r315 top
R54 "4.7K 1%" R0402_L 2035.73,2936 r0 top
R55 "4.7K 1%" R0402_L 2288,2732 r45 top
U1 "TPS54202DDCR" SOT23-6L 1268.4,2785 r0 top locked
U2 "TPS54202DDCR" SOT23-6L 120.6,1793 r180 top locked
U3 "JMS578" QFN48-L6.0-W6.0-P0.4 3246,591 r270 bottom
U4 "JMS578" QFN48-L6.0-W6.0-P0.4 3246,1342 r270 bottom
U5 "P25Q21H" SOP8_L 2989.39,872 r0 bottom
U6 "P25Q21H" SOP8_L 2989.39,1623 r0 bottom
U7 "JMS578" QFN48-L6.0-W6.0-P0.4 3246.11,2102.38 r270 bottom
U8 "P25Q21H" SOP8_L 2989.39,2383 r0 bottom
U9 "VL160" MQFN-28_L4.5-W3.5-P0.40-BL-EP 2313,2726 r270 bottom
U10 "VL822 Q7" QFN-76_L9.0-W9.0-P0.40-EP6.3-TL 1998,2645 r135 top
U11 "TPD4E02B04" DIO_TPD4E02B04DQAR 3183,2583 r180 bottom
U12 "TPD4E02B04" DIO_TPD4E02B04DQAR 3183,2872 r180 bottom
U13 "P25Q21H" SOP8_L 1550,2605 r45 top
U14 "TPS54202DDCR" SOT23-6L 1268.4,2417 r0 top
U15 "TPS54202DDCR" SOT23-6L 120.6,1103 r180 top locked
U16 "TPS54202DDCR" SOT23-6L 120.6,398 r180 top locked
Y1 "30Mhz" "OSC 3225-4P" 3430.46,335.34 r270 bottom
Y2 "30Mhz" "OSC 3225-4P" 3430.46,1086.34 r270 bottom
Y3 "30Mhz" "OSC 3225-4P" 3430.46,1846.34 r270 bottom
Y4 "25Mhz" "OSC 3225-4P" 1600,2869 r270 top

## Footprints (in the part's own frame and the unit in brackets; to place one, negate y for a bottom-side part, rotate by r counter-clockwise, add the part's x,y. Pads: shape width x height; smd on the part's side, far side on the other; paste and mask are expansions set on the pad)
C0402_L [mm] "贴片MLCC电容"
  rect 0.5x0.5 smd: 1(-0.45,0) 2(0.45,0)
  silkscreen extent -0.87,-0.46 0.88,0.46, body extent -0.5,-0.25 0.5,0.25, height 0.5
C0603_L [mm] "贴片MLCC电容"
  rect 0.75x0.85 smd: 1(-0.725,0) 2(0.725,0)
  silkscreen extent -1.35,-0.69 1.35,0.69, body extent -0.8,-0.4 0.8,0.4, height 0.8
C0805_L [mil] "贴片MLCC电容"
  rect 35x50 smd: 1(-37.4,0) 2(37.4,0)
  silkscreen extent -67,-36 67,36, body extent -39,-26 39,26, height 51
"CS 6*4 - B" [mm] "直径6mm，高4mm"
  rect 2.7x1 smd: 1(3,0)
  oval 2.7x1 smd: 2(-3,0)
  silkscreen extent -3.3,-3.3 3.43,3.3, body extent -3.5,-3.15 3.5,3.15, height 4.05
"CS 6*4 - R" [mm] "直径6mm，高4mm"
  rect 2.7x1 smd: 1(3,0)
  oval 2.7x1 smd: 2(-3,0)
  silkscreen extent -3.3,-3.3 3.43,3.3, body extent -3.5,-3.15 3.5,3.15, height 4.05
DC-012 [mm] "5.5*2.1"
  rect 2.6x5 hole 0.9 slot 3.5 at 90 deg: 1(0,0)
  rect 4.5x1.8 hole 0.7 slot 2.5 at 0 deg: 2(2.25,-5)
  rect 4x1.8 hole 0.7 slot 2.5 at 0 deg: 3(4.75,-2.8)
  silkscreen extent -1.35,-6.48 8,5.33, body extent -1.11,-6.47 7.89,4.53, height 13.6
DIO_TPD4E02B04DQAR [mm]
  rect 0.565x0.2 smd mask+0: 1(-0.417,1) 2(-0.417,0.5) 4(-0.417,-0.5) 5(-0.417,-1) 6(0.417,-1) 7(0.417,-0.5) 9(0.417,0.5) 10(0.417,1)
  rect 0.565x0.4 smd paste-1 mask+0: 3(-0.417,0) 8(0.417,0)
  silkscreen extent -1.35,-1.42 0.5,1.42, body extent -0.5,-1.25 0.5,1.25, height 0.55
"LED 0805B" [mil] "蓝色0805LED"
  rect 35x50 smd: 1(-37.4,-0.01)
  oct 35x50 smd: 2(37.4,-0.01)
  silkscreen extent -64,-33 75,33, body extent -39,-25 39,25, height 32
"LED 0805G" [mil] "绿色0805LED"
  rect 35x50 smd: 1(-37.4,0)
  oct 35x50 smd: 2(37.4,0)
  silkscreen extent -64,-33 75,33, body extent -39,-25 39,25, height 32
"Mark 1" [mm] "光学定位点，直径1mm"
  round 1 smd paste-1 mask+0.635: Mark(0,0)
  SIGNAL pour cut-out: 0,-1.143 -0.437,-1.056 -0.808,-0.808 -1.056,-0.437 -1.143,0 -1.143,0 -1.056,0.437 -0.808,0.808 -0.437,1.056 0,1.143 0,1.143 0.437,1.056 0.808,0.808 1.056,0.437 1.143,0 1.143,0 1.056,-0.437 0.808,-0.808 0.437,-1.056 0,-1.143
MQFN-28_L4.5-W3.5-P0.40-BL-EP [mm]
  rect 0.2x0.7 smd paste-100: 1(-1.8,-1.7) 2(-1.4,-1.7) 3(-1,-1.7) 4(-0.6,-1.7) 5(-0.2,-1.7) 6(0.2,-1.7) 7(0.6,-1.7) 8(1,-1.7) 9(1.4,-1.7) 10(1.8,-1.7) 15(1.8,1.7) 16(1.4,1.7) 17(1,1.7) 18(0.6,1.7) 19(0.2,1.7) 20(-0.2,1.7) 21(-0.6,1.7) 22(-1,1.7) 23(-1.4,1.7) 24(-1.8,1.7)
  rect 0.7x0.2 smd paste-100: 11(2.2,-0.6) 12(2.2,-0.2) 13(2.2,0.2) 14(2.2,0.6) 25(-2.2,0.6) 26(-2.2,0.2) 27(-2.2,-0.2) 28(-2.2,-0.6)
  rect 3x2 smd paste-100: 29(0,0)
  silkscreen extent -2.41,-1.78 2.29,1.78, body extent -2.26,-1.76 2.26,1.76, height 0.86
"OSC 3225-4P" [mm] "3.2*2.5*0.7mm(长宽高)"
  rect 1.3x1.2 smd: 1(-1.05,-0.85) 2(1.05,-0.85) 3(1.05,0.85) 4(-1.05,0.85)
  silkscreen extent -2.03,-1.75 1.91,1.65, body extent -1.6,-1.25 1.6,1.25, height 0.7
QFN48-L6.0-W6.0-P0.4 [mm] "QFN, 48-Leads, Body 6.00x6.00mm, Pitch 0.40mm, Thermal Pad 4.30x4.30mm封装库来自淘宝卖家 ID：黄晶宝石"
  oval 0.7x0.2 smd: 1(-3,2.2) 2(-3,1.8) 3(-3,1.4) 4(-3,1) 5(-3,0.6) 6(-3,0.2) 7(-3,-0.2) 8(-3,-0.6) 9(-3,-1) 10(-3,-1.4) 11(-3,-1.8) 12(-3,-2.2) 25(3,-2.2) 26(3,-1.8) 27(3,-1.4) 28(3,-1) 29(3,-0.6) 30(3,-0.2) 31(3,0.2) 32(3,0.6) 33(3,1) 34(3,1.4) 35(3,1.8) 36(3,2.2)
  oval 0.2x0.7 smd: 13(-2.2,-3) 14(-1.8,-3) 15(-1.4,-3) 16(-1,-3) 17(-0.6,-3) 18(-0.2,-3) 19(0.2,-3) 20(0.6,-3) 21(1,-3) 22(1.4,-3) 23(1.8,-3) 24(2.2,-3) 37(2.2,3) 38(1.8,3) 39(1.4,3) 40(1,3) 41(0.6,3) 42(0.2,3) 43(-0.2,3) 44(-0.6,3) 45(-1,3) 46(-1.4,3) 47(-1.8,3) 48(-2.2,3)
  rect 3.3x3.3 smd: 49(0,0)
  silkscreen extent -3.92,-3.15 3.15,3.15, body extent -3,-3 3,3, height 0.9
QFN-76_L9.0-W9.0-P0.40-EP6.3-TL [mm]
  oval 0.8x0.2 smd paste-100: 1(-4.45,3.599) 2(-4.45,3.2) 3(-4.45,2.799) 4(-4.45,2.4) 5(-4.45,1.999) 6(-4.45,1.6) 7(-4.45,1.199) 8(-4.45,0.8) 9(-4.45,0.399) 10(-4.45,0) 11(-4.45,-0.399) 12(-4.45,-0.8) 13(-4.45,-1.199) 14(-4.45,-1.6) 15(-4.45,-1.999) 16(-4.45,-2.4) 17(-4.45,-2.799) 18(-4.45,-3.2) 19(-4.45,-3.599) 39(4.45,-3.599) 40(4.45,-3.2) 41(4.45,-2.799) 42(4.45,-2.4) 43(4.45,-1.999) 44(4.45,-1.6) 45(4.45,-1.199) 46(4.45,-0.8) 47(4.45,-0.399) 48(4.45,0) 49(4.45,0.399) 50(4.45,0.8) 51(4.45,1.199) 52(4.45,1.6) 53(4.45,1.999) 54(4.45,2.4) 55(4.45,2.799) 56(4.45,3.2) 57(4.45,3.599)
  oval 0.2x0.8 smd paste-100: 20(-3.599,-4.45) 21(-3.2,-4.45) 22(-2.799,-4.45) 23(-2.4,-4.45) 24(-1.999,-4.45) 25(-1.6,-4.45) 26(-1.199,-4.45) 27(-0.8,-4.45) 28(-0.399,-4.45) 29(0,-4.45) 30(0.399,-4.45) 31(0.8,-4.45) 32(1.199,-4.45) 33(1.6,-4.45) 34(1.999,-4.45) 35(2.4,-4.45) 36(2.799,-4.45) 37(3.2,-4.45) 38(3.599,-4.45) 58(3.599,4.45) 59(3.2,4.45) 60(2.799,4.45) 61(2.4,4.45) 62(1.999,4.45) 63(1.6,4.45) 64(1.199,4.45) 65(0.8,4.45) 66(0.399,4.45) 67(0,4.45) 68(-0.399,4.45) 69(-0.8,4.45) 70(-1.199,4.45) 71(-1.6,4.45) 72(-1.999,4.45) 73(-2.4,4.45) 74(-2.799,4.45) 75(-3.2,4.45) 76(-3.599,4.45)
  rect 5.5x5.5 smd paste-100: 77(0,0)
  silkscreen extent -5.36,-4.7 4.7,4.7, body extent -4.5,-4.5 4.5,4.5, height 0.85
R0402_L [mm] "1/16W贴片电阻"
  rect 0.5x0.5 smd: 1(-0.425,0) 2(0.425,0)
  silkscreen extent -0.88,-0.46 0.87,0.46, body extent -0.5,-0.25 0.5,0.25, height 0.3
"SATA 15P 贴片" [mm] "SATA"
  rect 0.6x2.9 smd: P1(16.99,1.5) P2(18.26,1.5) P3(19.53,1.5) P4(20.8,1.5) P5(22.07,1.5) P6(23.34,1.5) P7(24.61,1.5) P8(25.88,1.5) P9(27.15,1.5) P10(28.42,1.5) P11(29.69,1.5) P12(30.96,1.5) P13(32.23,1.5) P14(33.5,1.5) P15(34.77,1.5) S1(3.02,1.5) S2(4.29,1.5) S3(5.56,1.5) S4(6.83,1.5) S5(8.1,1.5) S6(9.37,1.5) S7(10.64,1.5)
  rect 2.4x2.8 smd: SH1(-3.19,0) SH2(40.75,0)
  round 1 hole 1.2 unplated: ""(0,0) ""(38,0)
  body extent -3.97,-2.88 41.47,2.68, height 10.2
SMMS0420 [mm] "贴片电感"
  rect 1.724x1.92 smd paste+0.051 mask+0.102: 1(2.278,0) 2(-2.278,0)
  silkscreen extent -2.38,-2.23 2.38,2.23, body extent -2.37,-2.25 2.37,2.25, height 2
SOP8_L [mm] "4*5*1.8mm（长宽高）"
  rect 1.5x0.5 smd: 1(-2.5,1.905)
  oval 1.5x0.5 smd: 2(-2.5,0.635) 3(-2.5,-0.635) 4(-2.5,-1.905) 5(2.5,-1.905) 6(2.5,-0.635) 7(2.5,0.635) 8(2.5,1.905)
  silkscreen extent -2.69,-2.5 1.52,3.2, body extent -3,-2.5 3,2.5, height 1.9
SOT23-6L [mm] "3x1.6x1.1mm(长宽高)"
  rect 0.45x1 smd: 1(-0.95,-1.397) 2(0,-1.397) 3(0.95,-1.397) 4(0.95,1.397) 5(0,1.397) 6(-0.95,1.397)
  silkscreen extent -1.77,-1.78 1.55,0.51, body extent -1.5,-1.4 1.5,1.4, height 1.15
"TypeC 24p 直立" [mm]
  rect 0.3x1 smd paste-100: A1(-2.75,0.72) A2(-2.25,0.72) A3(-1.75,0.72) A4(-1.25,0.72) A5(-0.75,0.72) A6(-0.25,0.72) A7(0.25,0.72) A8(0.75,0.72) A9(1.25,0.72) A10(1.75,0.72) A11(2.25,0.72) A12(2.75,0.72) B1(2.75,-0.72) B2(2.25,-0.72) B3(1.75,-0.72) B4(1.25,-0.72) B5(0.75,-0.72) B6(0.25,-0.72) B7(-0.25,-0.72) B8(-0.75,-0.72) B9(-1.25,-0.72) B10(-1.75,-0.72) B11(-2.25,-0.72) B12(-2.75,-0.72)
  round 1.3 hole 0.7: SH1(-2.4,-2.15) SH2(2.4,-2.15) SH3(2.4,2.15) SH4(-2.4,2.15)
  Keep-Out Layer board cut-out: -3.42,0 -3.42,-0.066 -3.47,-0.187 -3.563,-0.28 -3.684,-0.33 -3.816,-0.33 -3.937,-0.28 -4.03,-0.187 -4.08,-0.066 -4.08,0 -4.08,0.066 -4.03,0.187 -3.937,0.28 -3.816,0.33 -3.684,0.33 -3.563,0.28 -3.47,0.187 -3.42,0.066 -3.42,0 -3.42,0
  Keep-Out Layer board cut-out: 4.244,0 4.244,-0.056 4.203,-0.16 4.126,-0.241 4.024,-0.287 3.968,-0.29 3.968,-0.29 3.556,-0.29 3.499,-0.289 3.393,-0.245 3.312,-0.163 3.268,-0.057 3.268,0 3.268,0.058 3.312,0.164 3.393,0.245 3.499,0.29 3.556,0.29 3.556,0.29 3.97,0.29 4.026,0.287 4.127,0.24 4.203,0.159 4.244,0.056 4.244,0 4.244,0
  Keep-Out Layer circle w0.005: c-3.75,0 r0.33
  Keep-Out Layer region: -3.42,0 -3.42,-0.066 -3.47,-0.187 -3.563,-0.28 -3.684,-0.33 -3.816,-0.33 -3.937,-0.28 -4.03,-0.187 -4.08,-0.066 -4.08,0 -4.08,0.066 -4.03,0.187 -3.937,0.28 -3.816,0.33 -3.684,0.33 -3.563,0.28 -3.47,0.187 -3.42,0.066 -3.42,0 -3.42,0
  Keep-Out Layer region: 4.244,0 4.244,-0.056 4.203,-0.16 4.126,-0.241 4.024,-0.287 3.968,-0.29 3.968,-0.29 3.556,-0.29 3.499,-0.289 3.393,-0.245 3.312,-0.163 3.268,-0.057 3.268,0 3.268,0.058 3.312,0.164 3.393,0.245 3.499,0.29 3.556,0.29 3.556,0.29 3.97,0.29 4.026,0.287 4.127,0.24 4.203,0.159 4.244,0.056 4.244,0 4.244,0
  Keep-Out Layer lines w0.005: 3.968,-0.29 ccw(c3.954,0) 4.244,0 ccw(c3.954,0) 3.97,0.29 3.556,0.29 ccw(c3.558,0) 3.268,0 ccw(c3.558,0) 3.556,-0.29 3.968,-0.29
  silkscreen extent -5,-2 5,2, body extent -4.47,-2.3 4.47,2.3, height 9.2
"USB3.1_Type-A 立式直插" [mil] "USB接口"
  round 47.2 hole 27.6: 1(-137.8,-29.5) 2(-39.4,-29.5) 3(39.4,-29.5) 4(137.8,-29.5) 5(157.5,29.5) 6(78.7,29.5) 7(0,29.5) 8(-78.7,29.5) 9(-157.5,29.5)
  round 118.1 hole 90.9: 10(-252,-25.6) 11(252,-25.6)
  silkscreen extent -270,-149 270,91, body extent -283,-163 283,112, height 461
XH2.54-WS-2P [mm] "长：10mm，宽：8mm，高：6.1mm"
  rect 2x3.5 smd: 0(-4.327,-2.15) 0(4.327,-2.15)
  rect 1.2x3.5 smd: 1(-1.25,4.981) 2(1.25,4.981)
  silkscreen extent -5,-4.06 5,4.06, body extent -5,-4 5,6.42, height 6.05
ZH1.5-WS-2P [mm] "长：6.1mm，宽：2.5mm，高：3.7mm"
  rect 1.5x1.95 smd: 0(-2.818,0) 0(2.818,0)
  rect 0.8x2.5 smd: 1(-0.75,4.05) 2(0.75,4.05)
  silkscreen extent -3.05,-2 3.03,4.06, body extent -3.05,-2 3.05,4.6, height 3.75

## Part data
C1 C2 C3 C4 C5 C6 C7 C8 C9 C10 C11 C13 C15 C16 C17 C18 C19 C20 C21 C22 C23 C24 C25 C26 C27 C28 C29 C30 C31 C32 C33 C34 C35 C36 C37 C38 C39 C40 C41 C42 C43 C44 C45 C46 C47 C48 C49 C50 C51 C52 C53 C54 C55 C56 C57 C58 C59 C60 C61 C62 C63 C64 C65 C66 C67 C68 C69 C70 C71 C72 C73 C74 C75 C76 C77 C78 C79 C80 C81 C82 C83 C84 C85 C86 C87 C88 C89 C90 C91 C92 C93 C94 C95 C96 C97 C98 C99 C100 C101 C102 C103 C104 C105 C106 C107 C108 C109 C110 C111 C112 C113 C114 C115 C116 C117 C118 C119 C120 C121 C122 C123 C124 C125 C126 C127 C128 C129 C130 C131 C132 C133 C134 C135 C137 C139 C140 C141 C142 C143 C144: library part C, "无极性贴片电容", BOM名称=无极性贴片电容, 学习资源=www.ooocke.com, 材质=X7R, 版权归属=源创客
CON1: library part P-DC, "低压电源接口", BOM名称=DC电源接口, 学习资源=www.ooocke.com, 版权归属=源创客
E1 E2 E3 E4 E5 E6 E7 E8 E9 E10 E11 E12 E13: library part C-CD, "贴片电解电容", BOM名称=贴片钽电容, 学习资源=www.ooocke.com, 版权归属=源创客
J4: library part "Typec 24p", "USB-C (USB TYPE-C) USB 3.2 Gen 2 (USB 3.1 Gen 2, Superspeed + (USB 3.1)) Receptacle Connector 24 Position Surface Mount, Right Angle; Through Hole", Package=None, Check_prices=https://www.snapeda.com/parts/1054500101/Molex/view-part/?ref=eda, MF=Molex, MP=1054500101, SnapEDA_Link=https://www.snapeda.com/parts/1054500101/Molex/view-part/?ref=snap
J5: "USB接口"
JP1 JP2: library part "Header 2", "2P接插件", BOM名称=2P接插件, 学习资源=www.ooocke.com, 版权归属=源创客
L1 L2 L3 L4 L5 L6 L7 L8: library part L, "小功率贴片电感", BOM名称=小功率贴片电感, 学习资源=www.ooocke.com, 版权归属=源创客
LED3 LED4 LED5 LED6 LED7 LED8: library part LED-3MM, "插件LED", BOM名称=插件LED, 学习资源=www.ooocke.com, 版权归属=源创客
MR1 MR2 MR3 MR4: library part MARK, "光学定位点", BOM名称=光学定位点, 学习资源=www.ooocke.com, 版权归属=源创客
R1 R2 R3 R4 R5 R6 R7 R8 R9 R10 R11 R12 R20 R21 R22 R23 R24 R25 R26 R27 R28 R29 R30 R31 R32 R33 R34 R35 R36 R37 R38 R39 R40 R41 R42 R43 R44 R45 R46 R47 R48 R49 R50 R51 R52 R53 R54 R55: library part R, "贴片电阻", BOM名称=贴片电阻, 学习资源=www.ooocke.com, 版权归属=源创客
U1 U2 U14 U15 U16: "DCDC Convert"
U5 U6 U8 U13: library part P25D40H
U11 U12: "ESD"
Y1 Y2 Y3 Y4: library part Crystal
Q1: BOM名称=场效应管, 学习资源=www.ooocke.com, 描述="P沟道 30V/4.2A", 版权归属=源创客

## Via types
v1: diameter 15.75, hole 11.81, SIGNAL to SIGNAL (Bottom), tented both sides, 651 vias

## Nets (pads, with @x,y where several pads share a name; then routed paths per layer and width w, separated by ;. In a path a pad name is that pad's centre, name@x,y a point inside that pad or via, vN(x,y) a via of type N, cw(c..) or ccw(c..) an arc to the next point about the centre after c; other vN are vias at no path point)
cap_RX1_N: C26.1 J3.S5 | length 843.1
  SIGNAL (Bottom) w4.29: J3.S5@1726.82,392.86 1726.82,389.5 cw(c1710.32,389.5) 1721.98,377.83 1719.87,375.72 cw(c1713.31,382.27) 1713.31,373 1711.25,373 ccw(c1711.25,368.71) 1708.22,371.75 ccw(c1711.25,368.71) 1706.96,368.71 1706.96,309.95 ccw(c1764.8,309.95) 1723.88,269.07 ccw(c1750.25,295.4) 1750.25,258.15 2403.3,258.15 ccw(c2403.3,262.44) 2406.33,259.4 ccw(c2403.3,262.44) 2407.59,262.44 2407.59,263.48 cw(c2414.4,263.48) 2409.58,268.3 C26.1@2415.28,274
cap_RX1_P: C29.1 J3.S6 | length 859.7
  SIGNAL (Bottom) w4.29: J3.S6@1676.82,392.86 1676.82,389.5 ccw(c1693.32,389.5) 1681.65,377.83 1683.77,375.72 ccw(c1690.32,382.27) 1690.32,373 1692.38,373 cw(c1692.38,368.71) 1695.42,371.75 cw(c1692.38,368.71) 1696.67,368.71 1696.67,305.69 ccw(c1754.51,305.69) 1713.59,264.81 1716.66,261.74 ; 1716.69,261.71 ccw(c1750.19,295.27) 1750.19,247.86 2403.3,247.86 cw(c2403.3,243.56) 2406.33,246.6 cw(c2403.3,243.57) 2407.59,243.57 2407.59,242.52 ccw(c2414.4,242.52) 2409.58,237.7 C29.1@2415.28,232
cap_RX2_N: C25.1 J2.S5 | length 307.5
  SIGNAL (Bottom) w4.29: 1724.92,1291.08 cw(c1768.28,1334.44) 1706.96,1334.44 1706.96,1476.69 cw(c1711.25,1476.69) 1708.22,1479.73 cw(c1711.25,1476.69) 1711.25,1480.98 1713.31,1480.98 ccw(c1713.31,1490.25) 1719.87,1483.7 1721.98,1485.82 ccw(c1710.32,1497.48) 1726.82,1497.48 J2.S5@1726.82,1500.84 ; 1724.93,1291.07 ccw(c1753.73,1319.89) 1753.73,1279.14 1782.3,1279.14 ccw(c1782.3,1283.43) 1785.33,1280.4 ccw(c1782.3,1283.44) 1786.59,1283.44 cw(c1795.92,1283.44) 1789.31,1290.03 C25.1@1794.28,1295
cap_RX2_P: C28.1 J2.S6 | length 324.1
  SIGNAL (Bottom) w4.29: J2.S6@1676.82,1500.84 1676.82,1497.48 ccw(c1693.32,1497.48) 1681.65,1485.82 1683.77,1483.7 ccw(c1690.32,1490.25) 1690.32,1480.98 1692.38,1480.98 cw(c1692.38,1476.69) 1695.42,1479.73 cw(c1692.38,1476.69) 1696.67,1476.69 1696.67,1330.18 ccw(c1757.99,1330.18) 1714.63,1286.82 1717.71,1283.74 ccw(c1753.64,1319.67) 1717.74,1283.7 ccw(c1753.64,1319.67) 1753.64,1268.86 1782.3,1268.86 cw(c1782.3,1264.57) 1785.33,1267.6 cw(c1782.3,1264.56) 1786.59,1264.56 ccw(c1795.92,1264.56) 1789.31,1257.97 C28.1@1794.28,1253
cap_RX3_N: C24.1 J1.S5 | length 1007.9
  SIGNAL (Bottom) w4.29: 1722.74,2458.85 cw(c1760.93,2496.99) 1706.96,2496.99 1706.96,2581.95 cw(c1711.25,2581.95) 1708.22,2584.98 cw(c1711.25,2581.95) 1711.25,2586.24 1713.31,2586.24 ccw(c1713.31,2595.5) 1719.87,2588.95 1721.98,2591.07 ccw(c1710.32,2602.74) 1726.82,2602.74 J1.S5@1726.82,2606.09 ; 1722.8,2458.8 ccw(c1760.93,2496.99) 1760.93,2443.01 2043.26,2443.01 cw(c2043.26,2396) 2076.5,2429.24 2078.7,2427.04 ; 2078.73,2427.02 ccw(c2105.36,2453.7) 2105.36,2416 2149.56,2416 cw(c2149.56,2394.22) 2164.96,2409.62 2167.98,2406.61 ccw(c2176.1,2414.73) 2176.1,2403.24 2288.16,2403.24 cw(c2288.16,2358.34) 2319.91,2390.09 ccw(c2337.33,2407.51) 2337.33,2382.87 2338,2382.87 2387,2382.87 2397,2392.87 2412,2392.87 2422,2382.87 2437,2382.87 2447,2392.87 2462,2392.87 2472,2382.87 2487,2382.87 2509.17,2382.87 ccw(c2509.17,2387.16) 2512.2,2384.13 ccw(c2509.17,2387.16) 2513.46,2387.16 cw(c2522.8,2387.16) 2516.19,2393.76 C24.1@2521.16,2398.73
cap_RX3_P: C27.1 J1.S6 | length 1007.5
  SIGNAL (Bottom) w4.29: J1.S6@1676.82,2606.09 1676.82,2602.74 ccw(c1693.32,2602.74) 1681.65,2591.07 1683.77,2588.95 ccw(c1690.32,2595.5) 1690.32,2586.24 1692.38,2586.24 cw(c1692.38,2581.95) 1695.42,2584.98 cw(c1692.38,2581.95) 1696.67,2581.95 1696.67,2492.72 ccw(c1750.64,2492.72) 1712.45,2454.59 ; 1712.48,2454.56 1715.54,2451.5 ccw(c1760.86,2496.82) 1715.64,2451.41 ccw(c1760.86,2496.82) 1760.75,2432.72 ccw(c1760.86,2496.82) 1760.86,2432.72 2043.14,2432.72 cw(c2043.14,2395.7) 2069.31,2421.88 2071.48,2419.72 ccw(c2105.29,2453.53) 2071.56,2419.63 ccw(c2105.29,2453.53) 2105.2,2405.71 ccw(c2105.29,2453.53) 2105.29,2405.71 2145.3,2405.71 cw(c2145.3,2383.93) 2160.7,2399.33 2160.75,2399.28 ccw(c2176.03,2414.56) 2160.81,2399.23 ccw(c2176.03,2414.56) 2175.97,2392.95 ccw(c2176.03,2414.56) 2176.03,2392.95 2288.1,2392.95 cw(c2288.1,2358.18) 2312.66,2382.78 ; 2312.68,2382.77 ccw(c2337.26,2407.35) 2337.26,2372.58 2509.17,2372.58 cw(c2509.17,2368.29) 2512.2,2371.33 cw(c2509.17,2368.29) 2513.46,2368.29 ccw(c2522.8,2368.29) 2516.19,2361.7 C27.1@2521.16,2356.73
cap_SSRX1_N: C66.2 U3.19 | length 169.1
  SIGNAL (Bottom) w5.1: U3.19@3373.95,583.13 U3.19@3374.02,583.09 ; U3.19@3373.95,583.13 U3.19@3364.11,583.13 U3.19@3373.95,583.13 ; U3.19@3373.95,583.13 U3.19@3374.02,583.09 ; U3.19@3374.02,583.09 ccw(c3386.22,608.35) 3386.22,580.3 ; U3.19@3374.02,583.09 ccw(c3386.22,608.35) 3386.22,580.3 ; 3386.22,580.3 cw(c3386.22,542.15) 3386.55,580.3 ; 3386.22,580.3 cw(c3386.22,542.15) 3386.55,580.3 ; 3386.55,580.3 3415.03,580.05 ; 3386.55,580.3 3415.03,580.05 ; 3415.03,580.05 ccw(c3415.28,608.1) C66.2@3435.54,588.71 ; 3415.03,580.05 ccw(c3415.28,608.1) C66.2@3435.54,588.71 ; C66.2@3435.54,588.71 C66.2@3442.84,596 C66.2@3435.54,588.71
cap_SSRX1_P: C68.2 U3.20 | length 169.1
  SIGNAL (Bottom) w5.1: U3.20@3373.95,567.38 cw(c3386.22,542.15) 3386.51,570.2 ; U3.20@3373.95,567.38 cw(c3386.22,542.15) 3386.51,570.2 ; U3.20@3373.95,567.38 U3.20@3364.11,567.38 U3.20@3373.95,567.38 ; 3386.51,570.2 3414.94,569.95 ; 3386.51,570.2 3414.94,569.95 ; 3414.94,569.95 ccw(c3415.28,608.1) 3415.28,569.95 ; 3414.94,569.95 ccw(c3415.28,608.1) 3415.28,569.95 ; 3415.28,569.95 cw(c3415.28,541.9) 3435.52,561.32 ccw(c3415.28,541.9) 3415.28,569.95 ; C68.2@3435.54,561.29 C68.2@3442.84,554 C68.2@3435.54,561.29
cap_SSRX2_N: C67.2 U4.19 | length 84.6
  SIGNAL (Bottom) w5.1: U4.19@3364.11,1334.13 3373.95,1334.13 3374.02,1334.09 ccw(c3386.22,1359.35) 3386.22,1331.3 cw(c3386.22,1293.15) 3386.55,1331.3 3415.03,1331.05 ccw(c3415.28,1359.1) 3435.54,1339.71 C67.2@3442.84,1347
cap_SSRX2_P: C69.2 U4.20 | length 84.6
  SIGNAL (Bottom) w5.1: U4.20@3364.11,1318.38 3373.95,1318.38 cw(c3386.22,1293.15) 3386.51,1321.2 3414.94,1320.95 ccw(c3415.28,1359.1) 3415.28,1320.95 cw(c3415.28,1292.9) C69.2@3435.52,1312.32 ; C69.2@3435.54,1312.29 C69.2@3442.84,1305
cap_SSRX4_N: C92.2 U7.19 | length 84.6
  SIGNAL (Bottom) w5.1: U7.19@3364.11,2094.13 3373.95,2094.13 3374.02,2094.09 ccw(c3386.22,2119.35) 3386.22,2091.3 cw(c3386.22,2053.15) 3386.55,2091.3 3415.03,2091.05 ccw(c3415.28,2119.1) 3435.54,2099.71 C92.2@3442.84,2107
cap_SSRX4_P: C93.2 U7.20 | length 84.6
  SIGNAL (Bottom) w5.1: U7.20@3364.11,2078.38 3373.95,2078.38 cw(c3386.22,2053.15) 3386.51,2081.2 3414.94,2080.95 ccw(c3415.28,2119.1) 3415.28,2080.95 cw(c3415.28,2052.9) C93.2@3435.52,2072.32 ; C93.2@3435.54,2072.29 C93.2@3442.84,2065
cap_SSTX1_N: C99.2 U10.4 | length 453.9
  SIGNAL w5.1: U10.4@2055.06,2454.29 2063.95,2445.41 2063.95,2441.45 2129.76,2375.63 ccw(c2138.53,2384.4) 2138.53,2372 2272.36,2372 2272.4,2371.95 2449.39,2371.95 ccw(c2449.39,2377.05) 2453,2373.45 ccw(c2449.39,2377.05) 2454.49,2377.05 2454.49,2377.78 cw(c2461.34,2377.78) 2456.49,2382.61 C99.2@2461.79,2387.9 ; C99.2@2460.29,2389.4 C99.2@2461.79,2390.9
cap_SSTX1_P: C98.2 U10.3 | length 459.8
  SIGNAL w5.1: U10.3@2043.96,2443.19 2052.84,2434.31 2056.8,2434.31 2122.66,2368.45 ; 2122.69,2368.43 ccw(c2138.47,2384.27) 2138.47,2361.9 2268.17,2361.9 2268.22,2361.85 2449.39,2361.85 cw(c2449.39,2356.75) 2453,2360.36 cw(c2449.39,2356.75) 2454.49,2356.75 2454.49,2356.03 ccw(c2461.34,2356.03) 2456.49,2351.2 C98.2@2461.79,2345.9
cap_SSTX2_N: C103.2 U10.13 | length 355.4
  SIGNAL w5.1: U10.13@2155.26,2554.49 2164.14,2545.61 2164.14,2541.65 2229.73,2476.06 ccw(c2239.53,2485.86) 2239.53,2472 2328.92,2472 ccw(c2328.92,2498.08) 2347.34,2479.63 2352.93,2485.21 cw(c2379.1,2459.04) 2352.97,2485.25 cw(c2379.1,2459.04) 2379.1,2496.05 2445.89,2496.05 ccw(c2445.89,2501.15) 2449.5,2497.54 ccw(c2445.89,2501.15) 2450.99,2501.15 2450.99,2501.87 cw(c2457.84,2501.87) 2452.99,2506.7 C103.2@2458.28,2512
cap_SSTX2_P: C102.2 U10.12 | length 363.7
  SIGNAL w5.1: U10.12@2144.16,2543.39 2153.04,2534.51 2157,2534.51 2222.64,2468.87 ccw(c2239.46,2485.69) 2222.7,2468.81 ccw(c2239.46,2485.69) 2239.39,2461.9 ccw(c2239.46,2485.69) 2239.46,2461.9 2333.1,2461.9 ccw(c2333.1,2487.98) 2351.53,2469.53 2360,2478 cw(c2379.19,2458.81) 2379.19,2485.95 2445.89,2485.95 cw(c2445.89,2480.85) 2449.5,2484.46 cw(c2445.89,2480.85) 2450.99,2480.85 2450.99,2480.13 ccw(c2457.84,2480.13) 2452.99,2475.3 C102.2@2458.28,2470
cap_SSTX3_N: C105.2 U10.26 | length 334.7
  SIGNAL w5.1: U10.26@2155.26,2735.51 2163.61,2743.86 ccw(c2154.5,2770.39) 2174.34,2750.56 ; 2174.36,2750.58 2233.82,2810.04 ; 2233.83,2810.05 cw(c2260.84,2783.11) 2238.13,2813.76 2243.62,2817.83 cw(c2253.53,2804.45) 2253.15,2821.09 2259.98,2821.25 cw(c2260.84,2783.11) 2260.84,2821.26 2299.37,2821.26 cw(c2299.37,2766.56) 2338.05,2805.24 ; 2335.18,2808.1 2338.05,2805.24 ; 2401.86,2768.28 2384.77,2785.37 ccw(c2361.84,2762.45) 2384.72,2785.42 ccw(c2361.84,2762.45) 2384.34,2785.79 ccw(c2361.84,2762.45) 2383.17,2786.86 ccw(c2361.84,2762.45) 2361.84,2794.87 2357.67,2794.87 cw(c2357.67,2817.21) 2341.87,2801.41 2338.05,2805.24 ; 2401.89,2768.26 ccw(c2421.72,2788.09) 2422.63,2760.05 C105.2@2432.95,2760.05
cap_SSTX3_P: C104.2 U10.25 | length 314.4
  SIGNAL w5.1: U10.25@2166.43,2724.34 2174.78,2732.69 cw(c2201.31,2723.58) 2181.48,2743.41 2240.97,2802.9 cw(c2260.84,2783.11) 2244.14,2805.64 2249.63,2809.71 cw(c2253.53,2804.45) 2253.38,2811 2260.17,2811.15 cw(c2260.84,2783.11) 2260.84,2811.16 2299.24,2811.16 cw(c2299.24,2766.24) 2331,2798 2334.77,2794.23 ccw(c2357.62,2817.09) 2334.8,2794.2 ccw(c2357.62,2817.09) 2357.62,2784.77 2357.67,2784.77 cw(c2357.67,2752.37) 2379.01,2776.75 cw(c2357.67,2752.37) 2380.16,2775.69 cw(c2357.67,2752.37) 2380.58,2775.28 2394.74,2761.11 cw(c2374.91,2741.28) C104.2@2402.95,2740.39 ; C104.2@2402.95,2730.05 C104.2@2402.95,2740.37
cap_SSTX4_N: C107.2 U10.32 | length 403.5
  SIGNAL w5.1: U10.32@2088.51,2802.26 2097.39,2811.14 2101.35,2811.14 2167.11,2876.9 cw(c2203.82,2840.18) 2203.82,2892.1 ; 2204.4,2892.1 2370.3,2892.1 cw(c2370.3,2854.45) 2396.93,2881.07 2398.72,2879.28 ccw(c2421,2901.56) 2421,2870.05 2429.89,2870.05 ccw(c2429.89,2875.15) 2433.5,2871.54 ccw(c2429.89,2875.15) 2434.99,2875.15 2434.99,2875.87 cw(c2441.84,2875.87) 2436.99,2880.7 C107.2@2442.28,2886
cap_SSTX4_P: C106.2 U10.31 | length 404.2
  SIGNAL w5.1: U10.31@2099.61,2791.16 2108.49,2800.04 2108.49,2804 2172.63,2868.14 cw(c2206.1,2834.66) 2172.68,2868.19 cw(c2206.1,2834.66) 2206.1,2882 2220,2882 2235,2882 2245,2872 2260,2872 2270,2882 2309,2882 2370.2,2882 cw(c2370.2,2854.2) 2389.86,2873.86 2391.63,2872.09 ccw(c2420.93,2901.4) 2420.93,2859.95 2429.89,2859.95 cw(c2429.89,2854.85) 2433.5,2858.46 cw(c2429.89,2854.85) 2434.99,2854.85 2434.99,2854.13 ccw(c2441.84,2854.13) 2436.99,2849.3 C106.2@2442.28,2844
cap_SSTX_N: C101.2 U10.49 | length 306.6
  SIGNAL w5.1: U10.49@1863.01,2757.78 U10.49@1870.47,2750.33 ; U10.49@1870.48,2750.32 cw(c1867.03,2746.89) 1871.9,2746.89 ccw(c1876.76,2746.89) 1873.31,2743.45 1877.74,2739.03 ; 1877.74,2739.02 ccw(c1881.34,2742.63) 1881.34,2737.53 1883.46,2737.53 1883.62,2737.7 1886.85,2737.7 ccw(c1886.85,2744.65) v1(1891.77,2739.73)
  SIGNAL (Bottom) w5.1: v1(1891.77,2739.73) 1894.37,2739.73 1900.08,2734.03 1959.85,2734.03 ccw(c1959.85,2757.96) 1976.77,2741.04 1976.83,2741.09 cw(c1993.62,2724.3) 1976.87,2741.13 cw(c1993.62,2724.3) 1993.62,2748.05 2032,2748.05 2047,2748.05 2057.93,2758.98 2072.93,2758.98 2083.85,2748.05 2107,2748.05 2110.73,2748.05 ccw(c2110.73,2776.1) 2130.99,2756.71 C101.2@2138.28,2764
cap_SSTX_P: C100.2 U10.50 | length 308.2
  SIGNAL w5.1: U10.50@1851.84,2746.61 1859.3,2739.15 ccw(c1862.74,2742.59) 1862.74,2737.73 cw(c1862.74,2732.86) 1866.17,2736.31 ; 1866.18,2736.3 1872.29,2730.19 ccw(c1875.87,2733.82) 1873.72,2729.2 1874.41,2728.88 cw(c1867.95,2714.87) 1875.89,2728.09 ccw(c1878.47,2732.49) 1876.83,2727.66 1877.5,2727.43 cw(c1877.5,2721.51) 1881.7,2725.7 1886.55,2720.84 ccw(c1891,2725.29) v1(1891,2719)
  SIGNAL (Bottom) w5.1: v1(1891,2719) 1893.88,2719 1898.81,2723.93 1964.03,2723.93 ccw(c1964.03,2747.86) 1980.96,2730.94 1983.91,2733.9 ; 1983.93,2733.91 cw(c1993.7,2724.11) 1993.7,2737.95 2110.73,2737.95 cw(c2110.73,2709.9) C100.2@2130.96,2729.32 ; C100.2@2130.99,2729.29 C100.2@2138.28,2722
cap_TX1_N: C23.1 J3.S3 | length 1630.4
  SIGNAL (Bottom) w4.29: J3.S3@1826.82,392.86 1826.82,390.44 ccw(c1845.58,390.44) 1832.31,377.17 ccw(c1842.38,387.24) 1842.38,373 cw(c1842.38,368.71) 1845.41,371.75 cw(c1842.38,368.71) 1846.67,368.71 1846.67,332 ccw(c1879.67,332) 1856.31,308.7 ; 1856.34,308.67 1859.39,305.62 ccw(c1890.09,336.32) 1890.09,292.9 1949.25,292.9 ccw(c1949.25,325.62) 1972.39,302.49 1975.43,305.53 ccw(c1944.95,336.01) 1988.06,336.01 1988.06,369.49 cw(c2033.88,369.49) 2001.48,401.89 cw(c2033.88,369.49) 2033.88,415.32 2534.25,415.32 cw(c2534.25,380.46) 2558.89,405.11 2569.1,394.9 cw(c2545.2,371) 2579,371 ccw(c2669.66,371) 2605.55,306.89 2605.92,306.53 ccw(c2670.67,371.28) 2670.67,279.71 2913.16,279.71 2913.59,279.28 3038.83,279.28 3039.26,279.71 3110.08,279.71 ccw(c3110.08,313.6) 3132.22,287.95 3154.4,307.09 ccw(c3132.26,332.74) 3166.15,332.74 cw(c3189.74,332.74) 3174.3,350.59 C23.1@3182,358.28
cap_TX1_P: C20.1 J3.S2 | length 1631
  SIGNAL (Bottom) w4.29: J3.S2@1876.82,392.86 1876.82,390.44 cw(c1858.06,390.44) 1871.32,377.17 cw(c1861.25,387.24) 1861.25,373 ccw(c1861.25,368.71) 1858.22,371.75 ccw(c1861.25,368.71) 1856.96,368.71 1856.96,332.05 ccw(c1879.8,332.05) 1863.65,315.91 ccw(c1894.35,346.61) 1894.35,303.19 1949.21,303.19 ccw(c1949.21,325.72) 1965.13,309.78 ccw(c1934.66,340.27) 1977.77,340.27 1977.77,369.59 cw(c2033.63,369.59) 1994.13,409.1 1994.23,409.2 cw(c2033.84,369.58) 1994.3,409.27 cw(c2033.84,369.58) 2033.84,425.61 2534.37,425.61 cw(c2534.37,380.77) 2566.08,412.47 2576.69,401.86 cw(c2546.28,371.45) 2589.29,371.45 ccw(c2670.74,371.45) 2613.15,313.86 ccw(c2670.74,371.45) 2670.74,290 2865,290 2882.43,290 2892.43,300 2907.43,300 2917.86,289.57 2932.86,289.57 2943.28,300 2958.28,300 2968.71,289.57 2983.71,289.57 2994.14,300 3009.14,300 3019.57,289.57 3034.57,289.57 3045,300 3060,300 3070,290 3085,290 3110.08,290 ccw(c3110.08,313.6) 3125.5,295.73 3147.68,314.88 ccw(c3132.26,332.74) C20.1@3147.72,350.57 ; C20.1@3140,358.28 C20.1@3147.7,350.59